# Altium PCB PCB1.PcbDoc (part 1 of 2)
Units mil, origin at the board's own origin, x right, y up, seen from the top; angles counter-clockwise.
Board outline 2755.91 x 2362.2 mil, 4 copper layers (Top Layer, GND, POWER, Bottom Layer), stack 23.756 mil thick; 125 components, 157 nets, 714 pads, 307 vias.
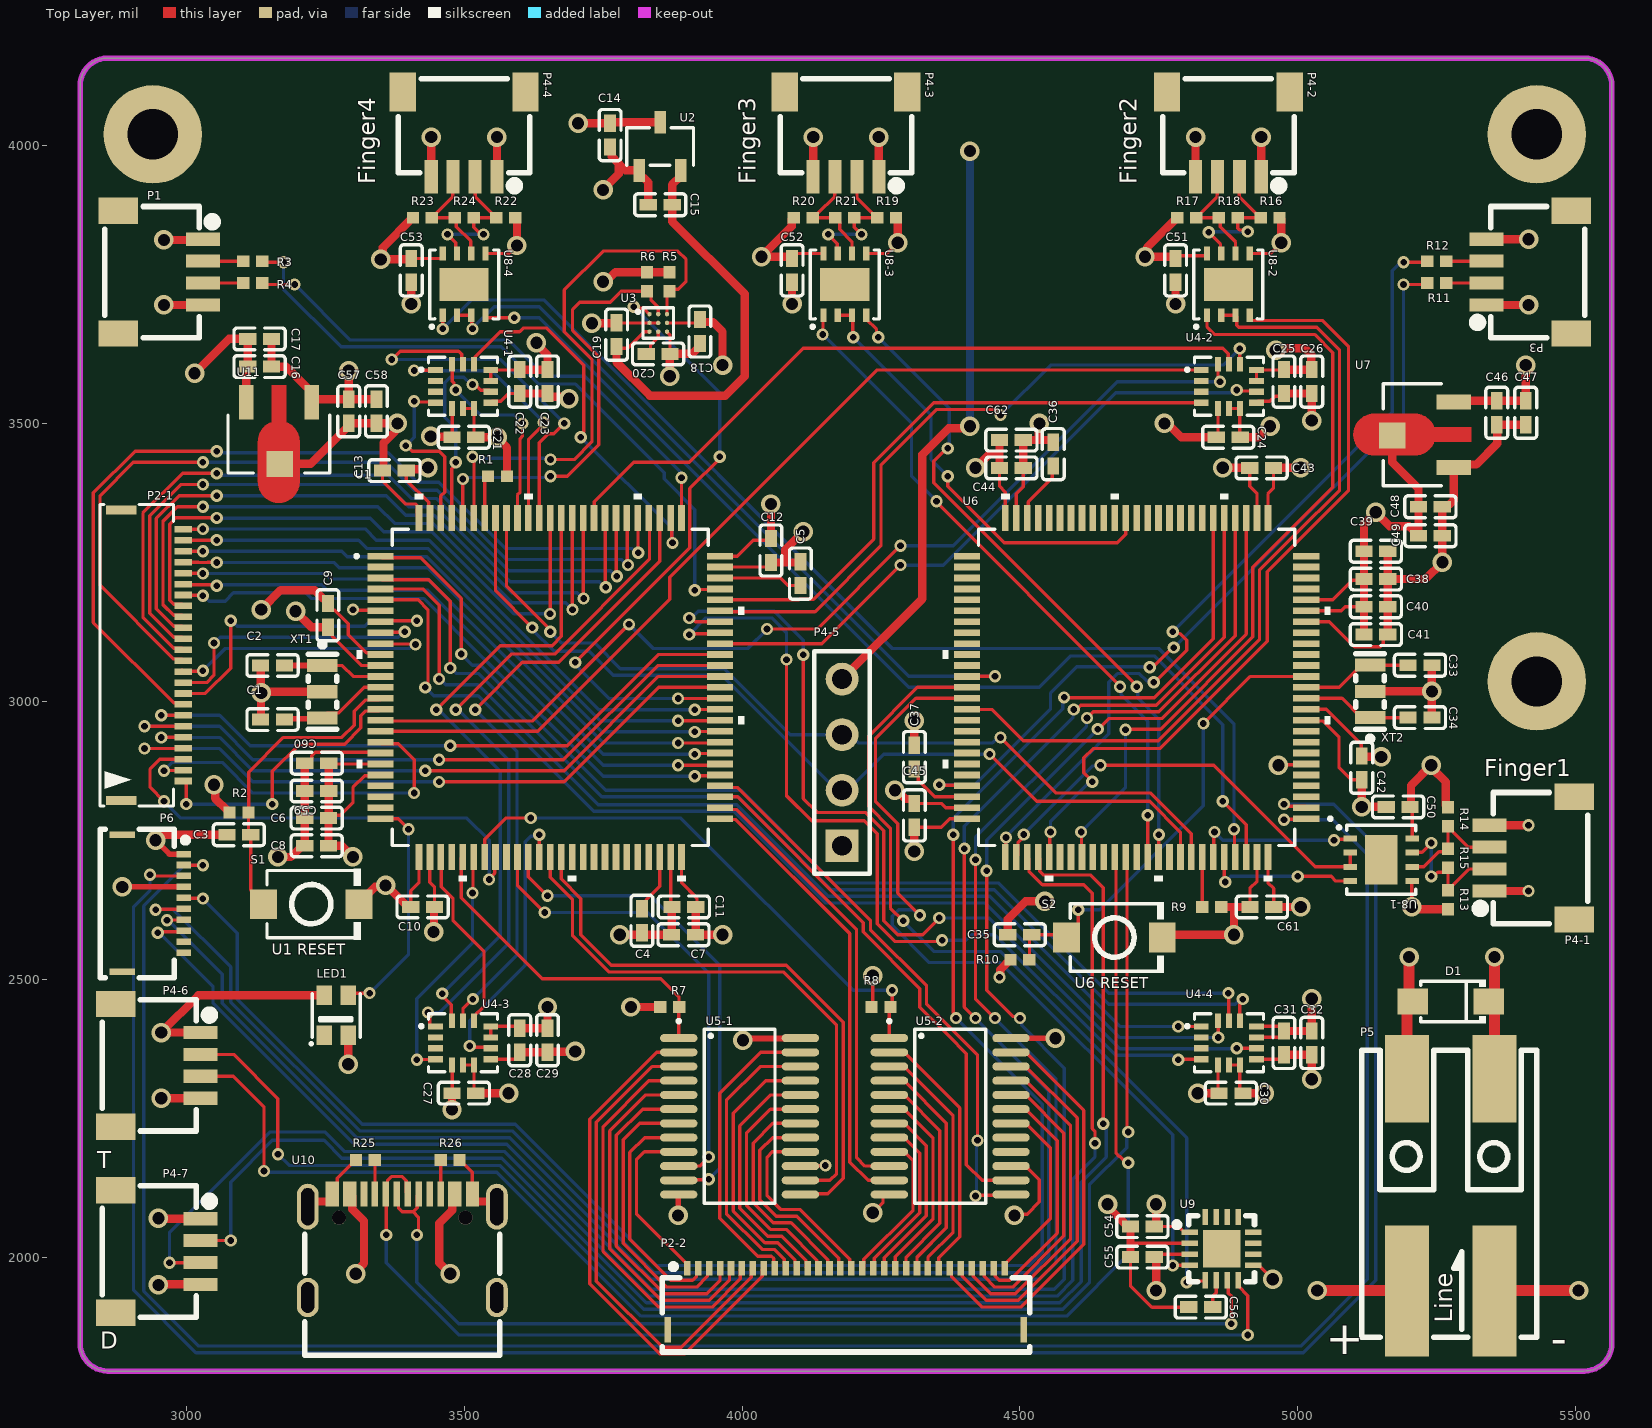
[diagram p0: Top Layer view]
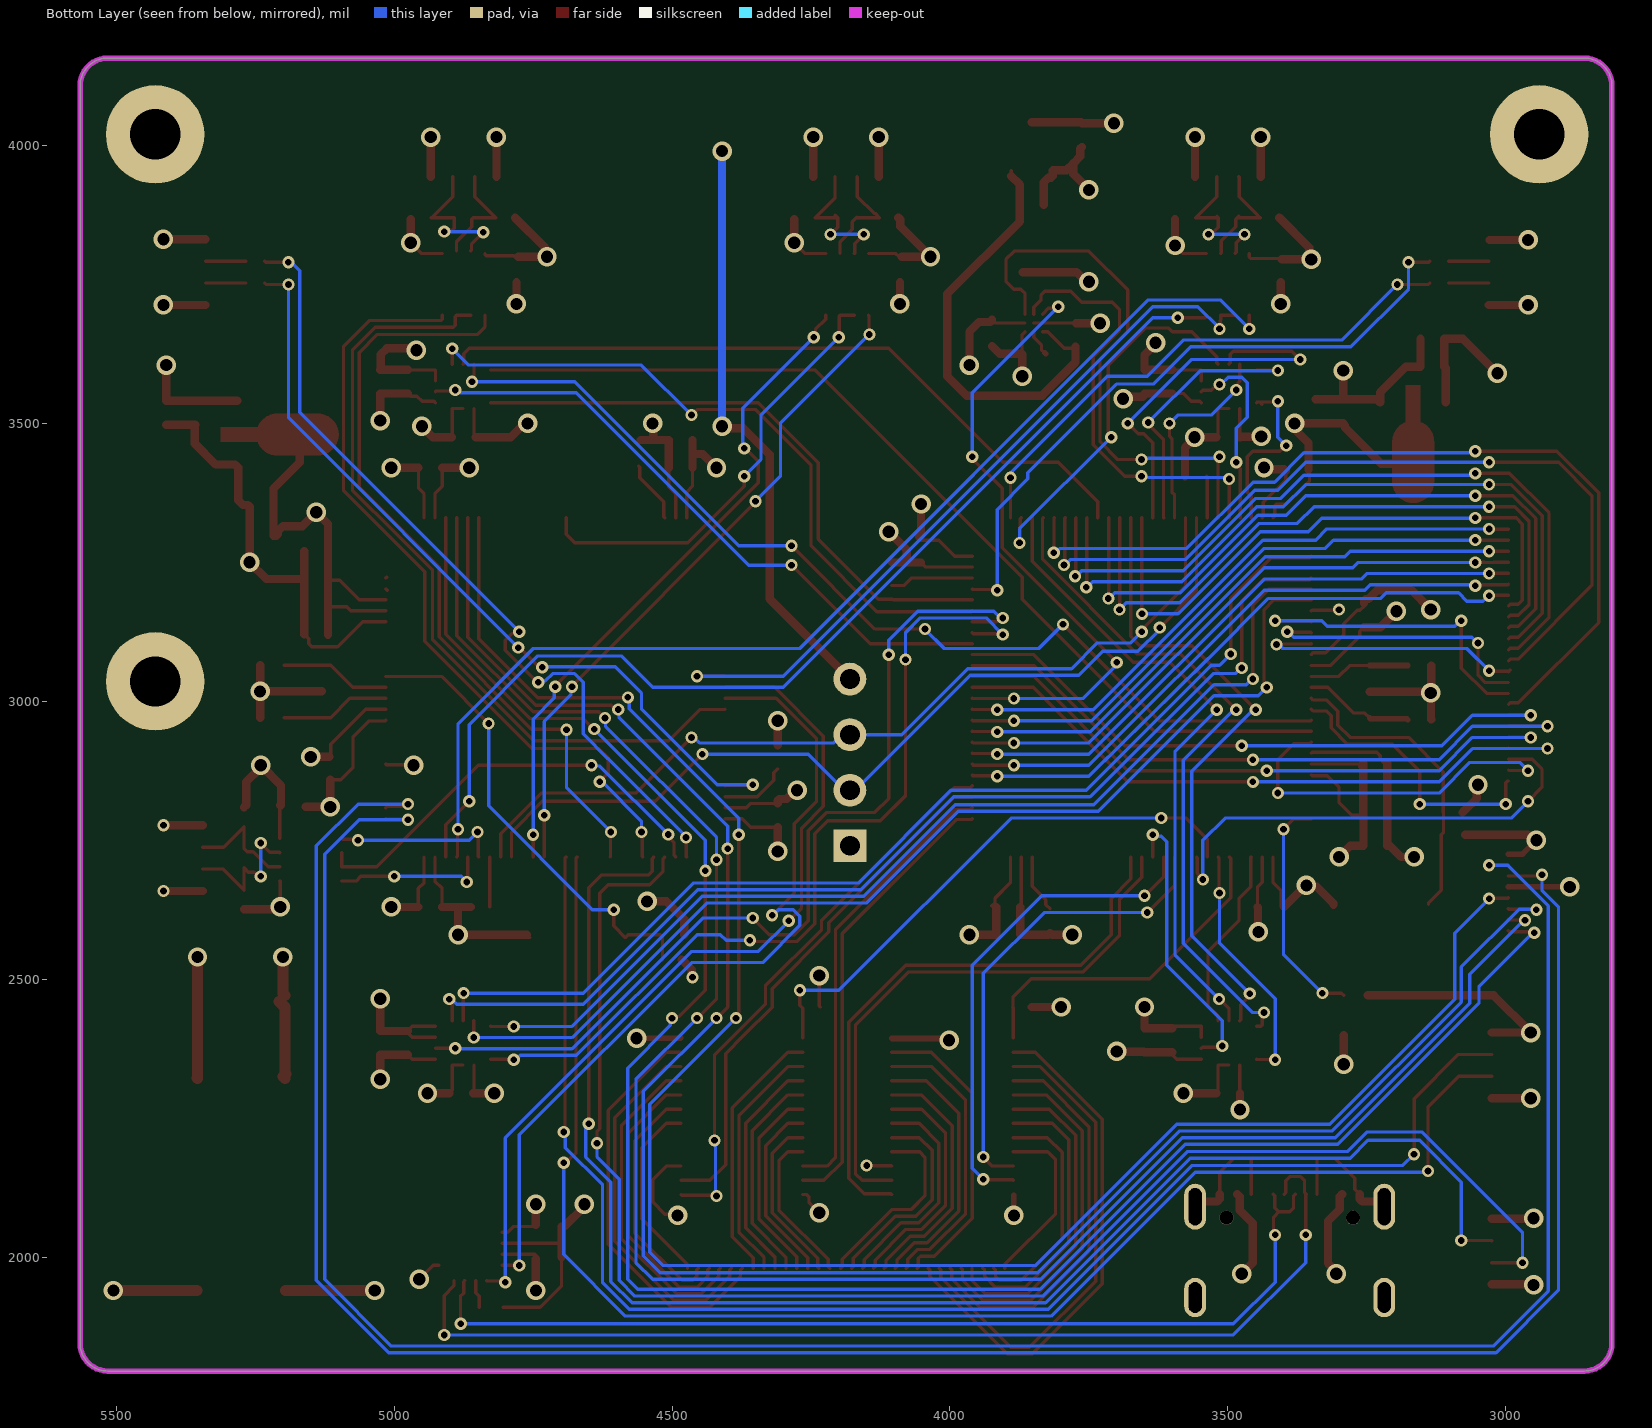
[diagram p1: Bottom Layer view, seen from below]
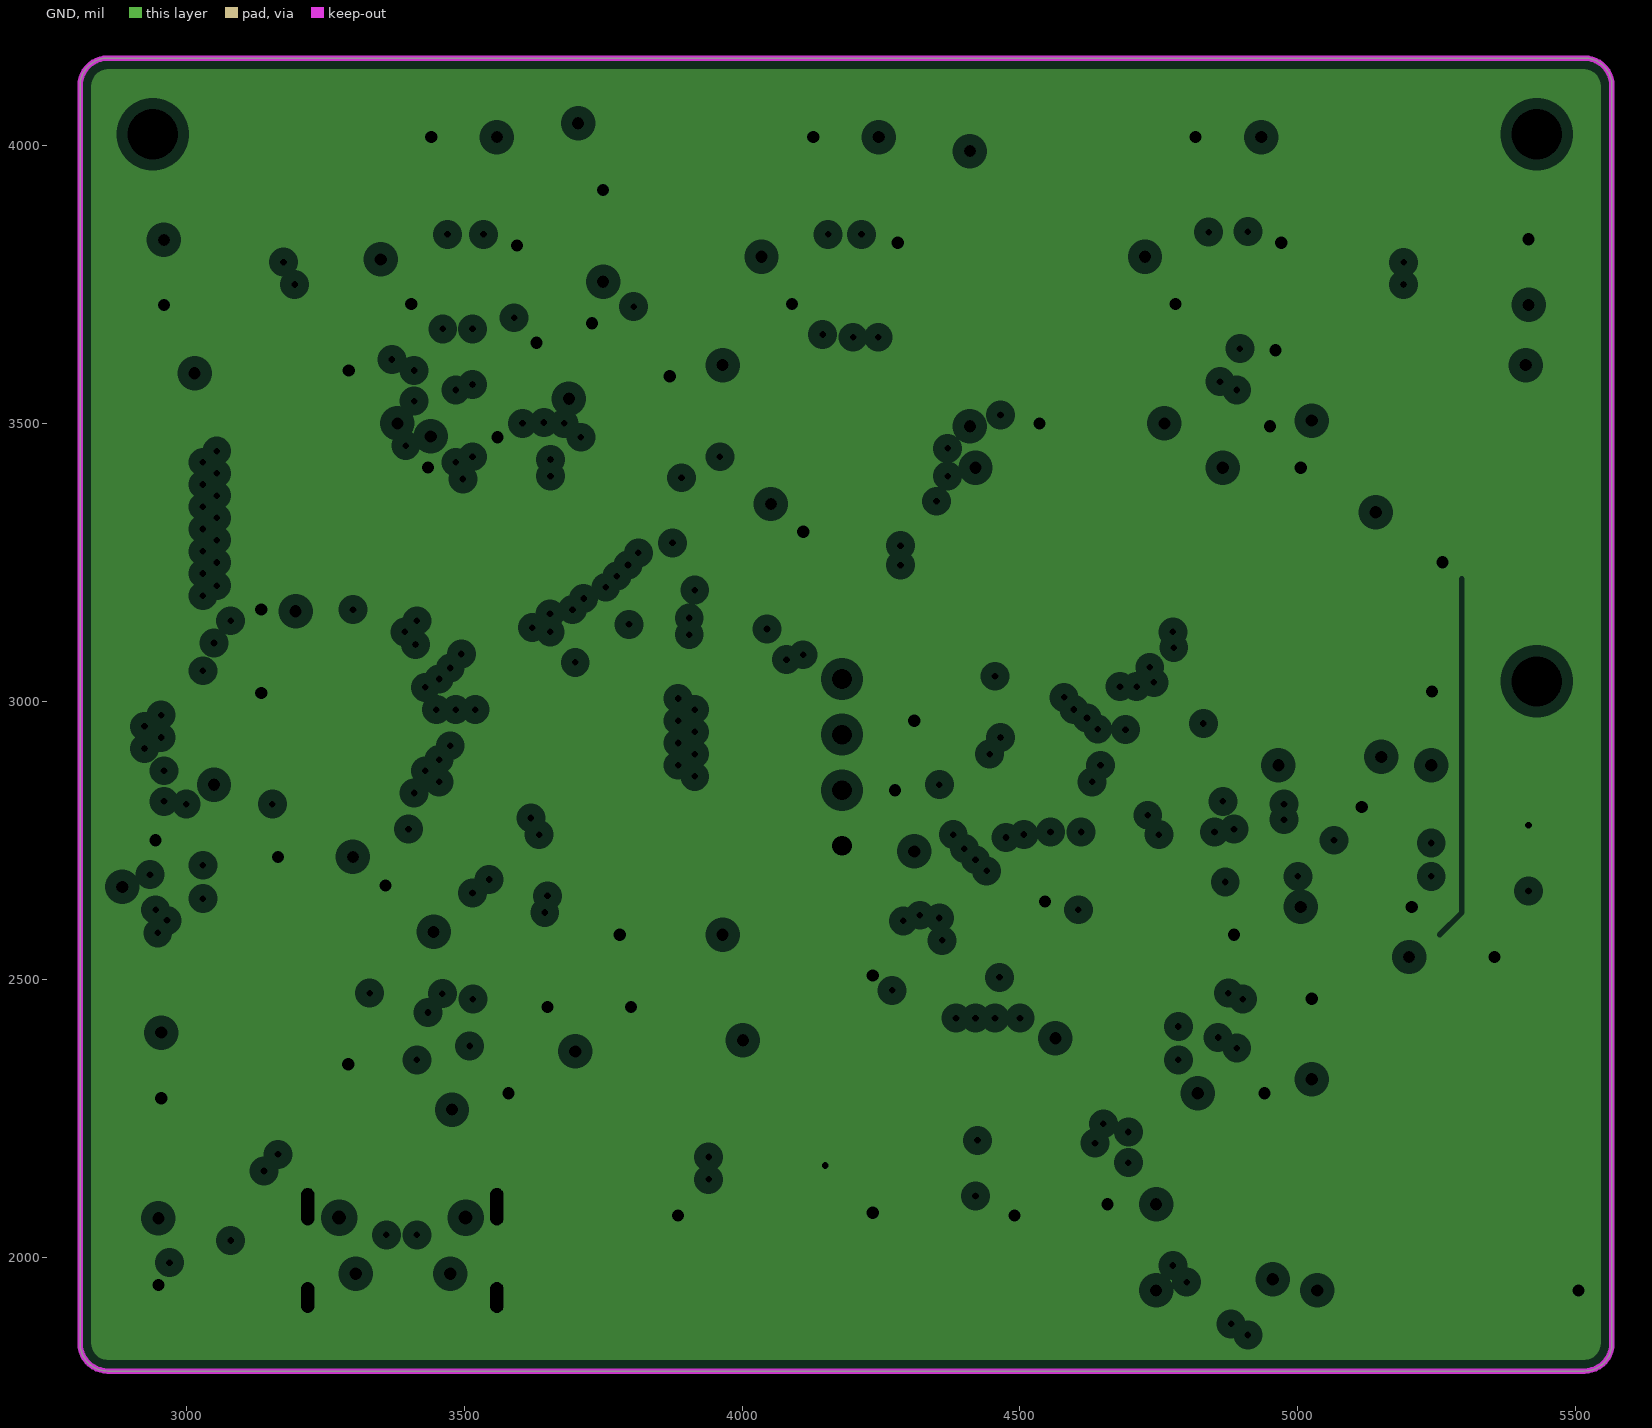
[diagram p2: GND, clearances drawn from the general rule]
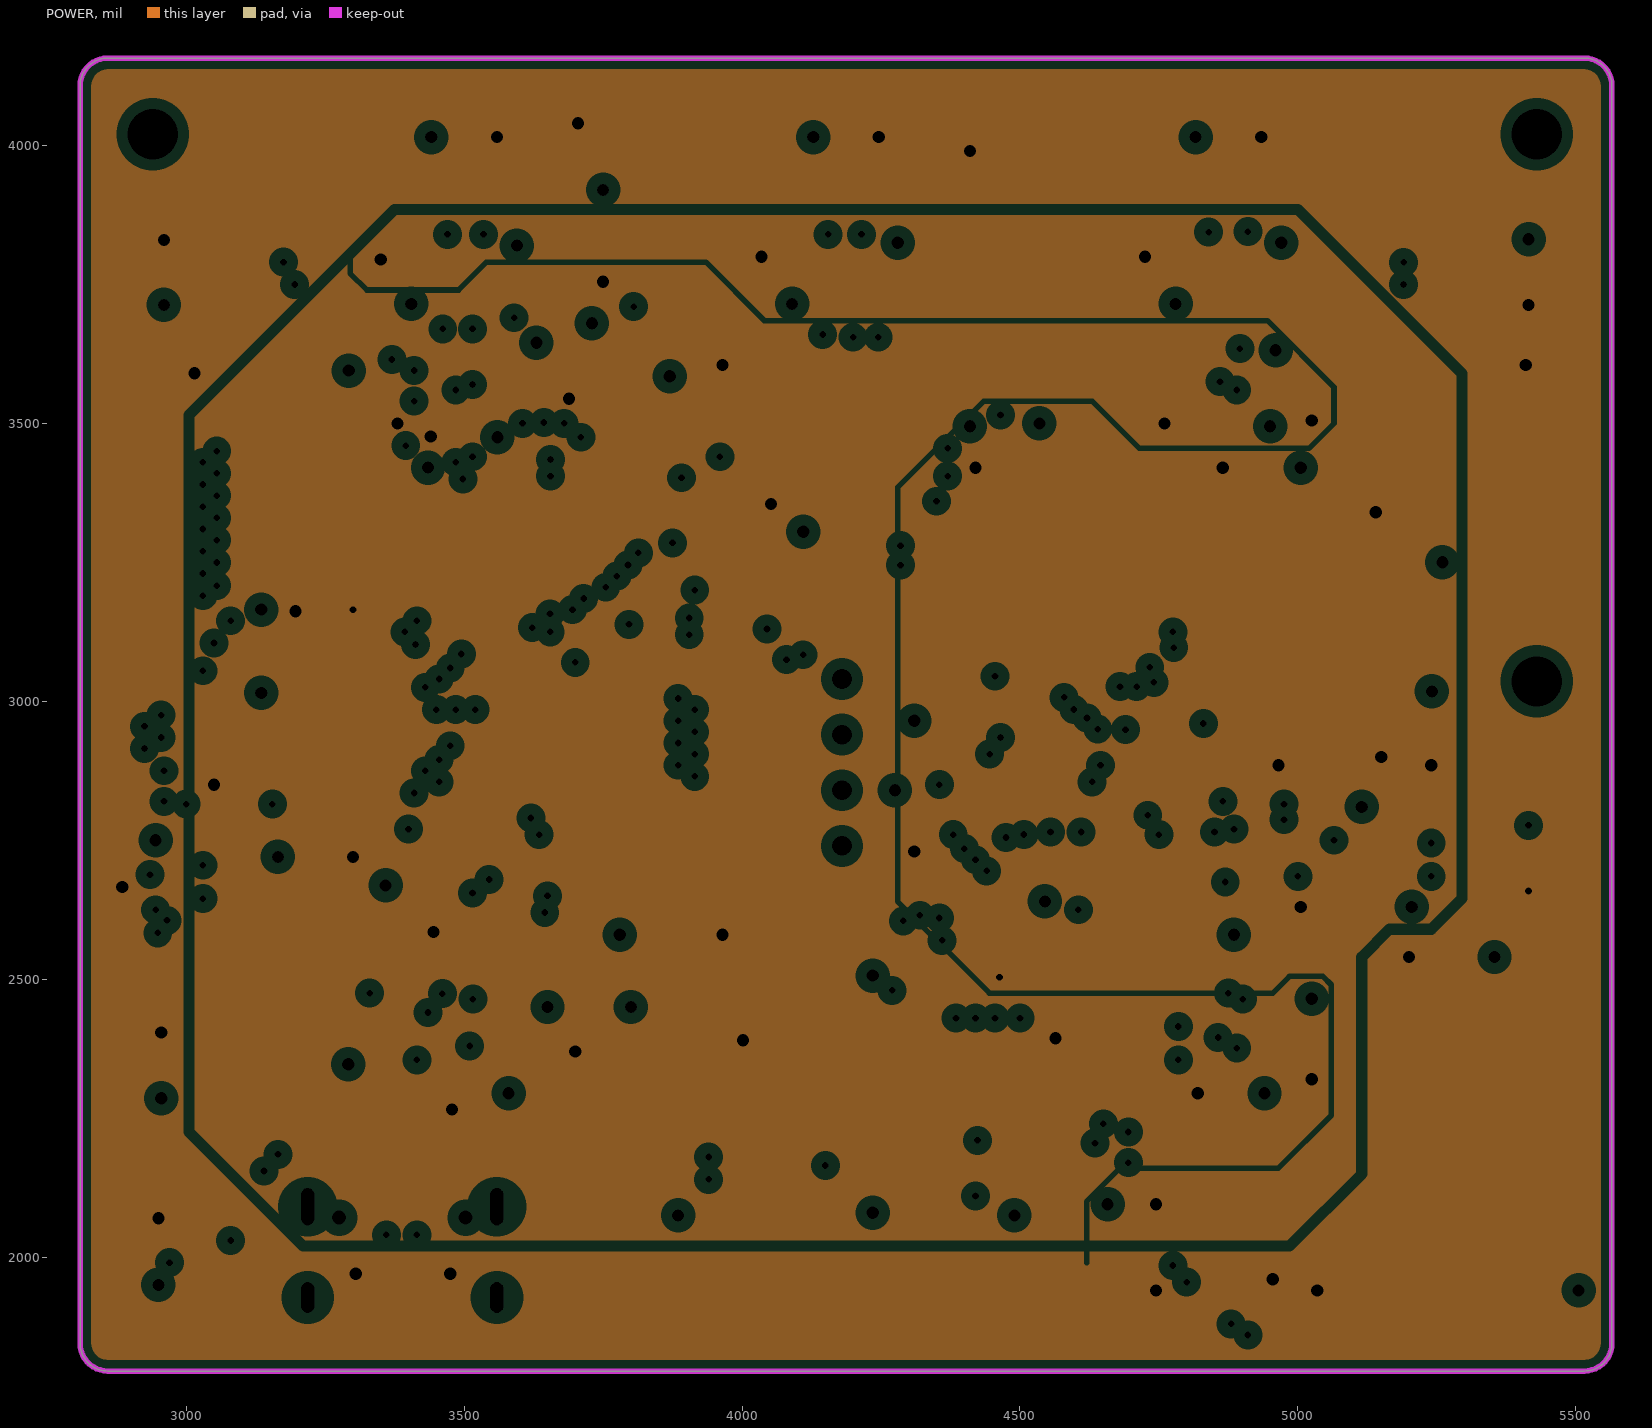
[diagram p3: POWER, clearances drawn from the general rule]
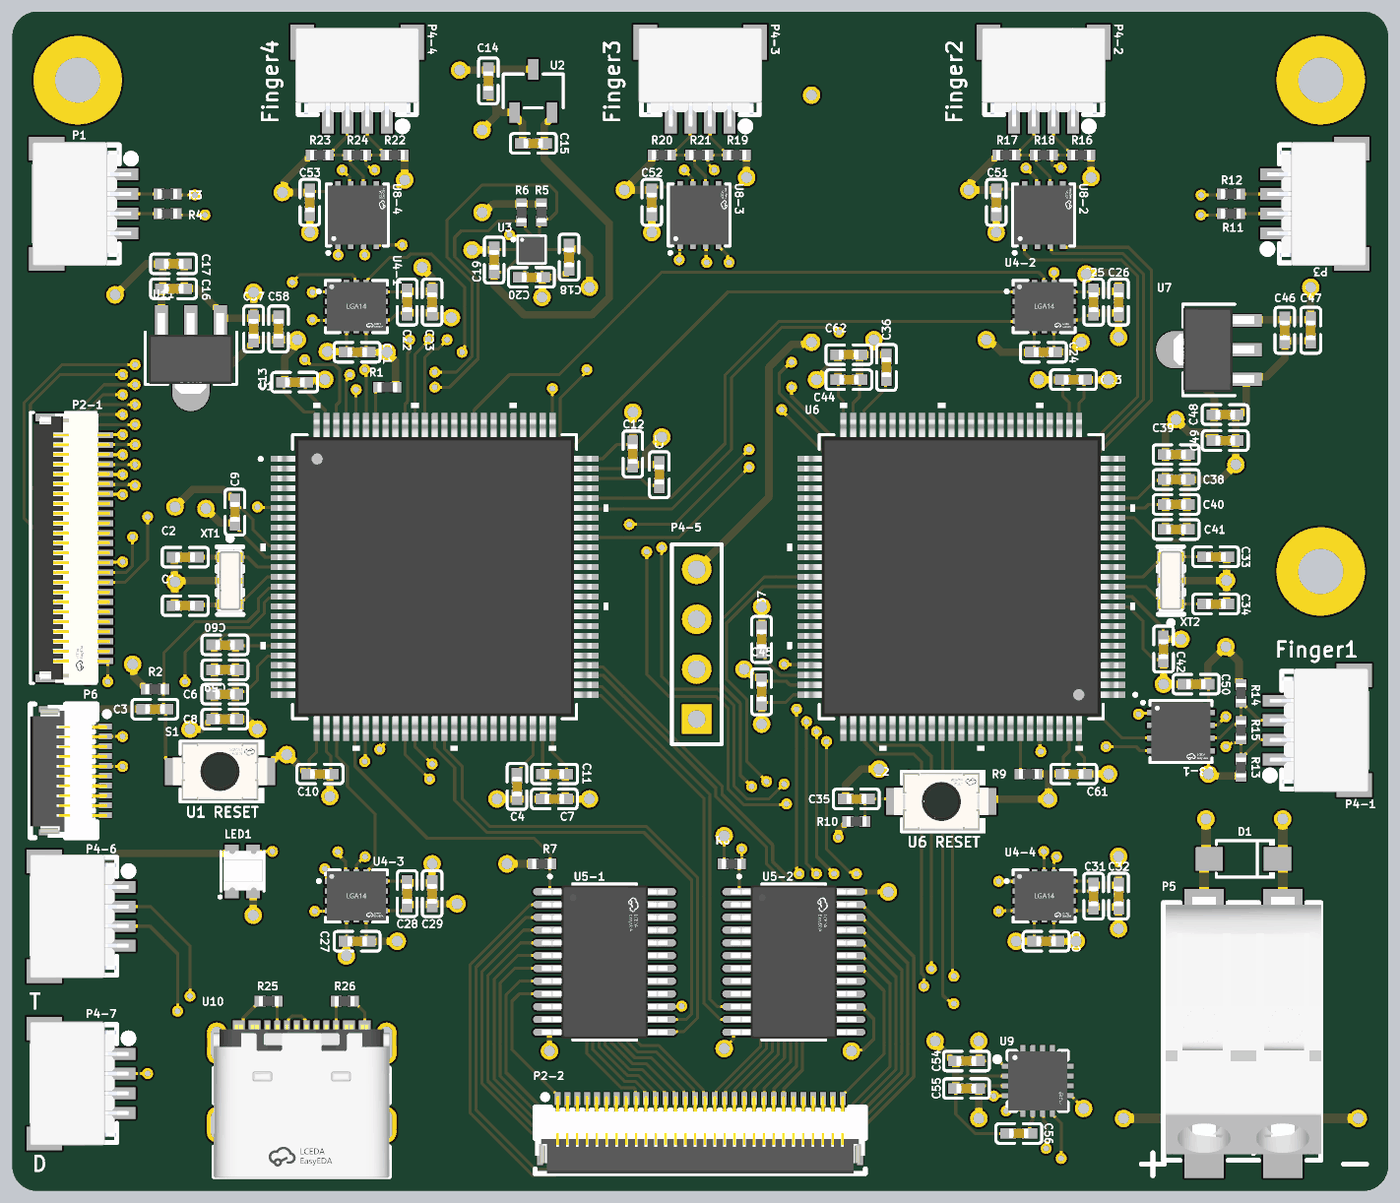
[diagram p5: 3D render of the assembled board from above, using the file's embedded part models]

## Layer stack, top to bottom
Top Solder: solder mask 0.4, Solder Resist, Dk 3.5
Top Layer: signal copper 1.4
Dielectric 2: prepreg 2.8, PP-006, Dk 4.1
GND: plane copper 1.378, net GND
Dielectric 1: dielectric 12.6, FR-4, Dk 4.8
POWER: plane copper 1.378, net (Multiple Nets)
Dielectric 3: prepreg 2.8, PP-006, Dk 4.1
Bottom Layer: signal copper 1.4
Bottom Solder: solder mask 0.4, Solder Resist, Dk 3.5

## Board outline
2809.09,1845 ccw(c2859.09,1845) 2859.09,1795 5515,1795 ccw(c5515,1845) 5565,1845 5565,4107.2 ccw(c5515,4107.2) 5515,4157.2 2859.09,4157.2 ccw(c2859.09,4107.2) 2809.09,4107.2

## Design rules (kind name [scope] priority, off if disabled: settings)
Clearance Clearance_BGA [WithinRoom('BGA','BGA_1')] p1: gap=3 ignorepadtopadclearanceinfootprint=FALSE
Clearance [All] p2: gap=10 ignorepadtopadclearanceinfootprint=FALSE
FanoutControl Fanout_BGA [IsBGA] p1: bgadir=Out bgaviamode=Centered fanoutstyle=BGA fanoutdirection=Alternating viagrid=1 // Fanout_BGA (Default Rule)
FanoutControl Fanout_Default [All] p5: bgadir=Out bgaviamode=Centered fanoutstyle=BGA fanoutdirection=Alternating viagrid=1 // Fanout_Default (Default Rule)
PlaneClearance [All] p1: clearance=20
PlaneConnect [All] p1: planeconnectstyle=Relief reliefexpansion=20 reliefentries=4 reliefconductorwidth=10 reliefairgap=10
PolygonConnect [All] p1: connectstyle=Relief reliefconductorwidth=10 reliefentries=4 polygonreliefangle="90 Angle" airgapwidth=10
RoutingVias RoutingVias_BGA [WithinRoom('BGA','BGA_1')] p1: holewidth=8 width=16 viastyle="Through Hole" minholewidth=8 minwidth=16 maxholewidth=8 maxwidth=18
RoutingVias [All] p2: holewidth=10 width=22 viastyle="Through Hole" minholewidth=10 minwidth=22 maxholewidth=28 maxwidth=35
ShortCircuit [All] p1: allowed=TRUE
SolderMaskExpansion [All] p1: expansion=4 istentingtop=FALSE
SupplyNets "Schematic Supply Nets_6" [InNet('VDD2')] p1: voltage=0.000
SupplyNets "Schematic Supply Nets_4" [InNet('VDD1')] p2: voltage=0.000
SupplyNets "Schematic Supply Nets_5" [InNet('1.8V')] p3: voltage=0.000
SupplyNets "Schematic Supply Nets_2" [InNet('GND')] p4: voltage=0.000
SupplyNets "Schematic Supply Nets" [InNet('+5V')] p5: voltage=0.000
Width Width_BGA [WithinRoom('BGA','BGA_1')] p1: maxlimit=5 minlimit=3 preferedwidth=4 minimp=50.000000 maximp=50.000000 favimp=50.000000
Width [All] p2: maxlimit=20 minlimit=6 preferedwidth=6 minimp=50.000000 maximp=50.000000 favimp=50.000000
25 further rules are at their usual default settings.

## Classes and differential pairs
component class Sheet2_COM: C33 C34 C35 C36 C37 C38 C39 C40 C41 C42 C43 C44 C45 C46 C47 C48 C49 C50 C51 C52 C53 C54 C55 C56 C61 C62 D1 P3 P4-1 P4-2 P4-3 P4-4 P4-5 P4-6 P4-7 P5 P6 R9 R10 R11 R12 R13 R14 R15 R16 R17 R18 R19 R20 R21 R22 R23 R24 R25 R26 S2 U6 U7 U8-1 U8-2 U8-3 U8-4 U9 U10 XT2
component class Sheet1_Palm: C1 C2 C3 C4 C5 C6 C7 C8 C9 C10 C11 C12 C13 C14 C15 C16 C17 C18 C19 C20 C21 C22 C23 C24 C25 C26 C27 C28 C29 C30 C31 C32 C57 C58 C59 C60 LED1 P1 P2-1 P2-2 R1 R2 R3 R4 R5 R6 R7 R8 S1 U1 U2 U3 U4-1 U4-2 U4-3 U4-4 U5-1 U5-2 U11 XT1

## Components (designator, comment, footprint, x,y, rotation, side; value= is the part's Value field where it differs from the comment)
C1 "20pF" C0402 3155,2967.2 r0 top
C2 "20pF" C0402 3155,3064.4 r0 top
C3 "0.1μF" C0402 3095,2760 r180 top
C4 "2.2μF" C0402 3820,2605 r90 top
C5 "2.2μF" C0402 4105,3230 r270 top
C6 "0.1μF" C0402 3235,2790 r180 top
C7 "4.7μF" C0402 3895,2580 r180 top
C8 "1μF" C0402 3235,2740 r180 top
C9 "0.1μF" C0402 3255,3155 r270 top
C10 "0.1μF" C0402 3425,2630 r0 top
C11 "0.1μF" C0402 3895,2630 r0 top
C12 "0.1μF" C0402 4052,3271 r90 top
C13 "0.1μF" C0402 3375,3415 r180 top
C14 "1μF" C0402 3762.6,4018.36 r90 top
C15 "1μF" C0402 3852.6,3893.36 r0 top
C16 "10μF" C0402 3132.32,3602.08 r180 top
C17 "0.1μF" C0402 3132.32,3652.08 r180 top
C18 "0.1μF" C0402 3924.25,3665 r90 top
C19 "0.1μF" C0402 3774.25,3660 r270 top
C20 "2.2μF" C0402 3849.25,3625 r180 top
C21 "10nF" C0402 3500,3475 r180 top
C22 "0.1μF" C0402 3600,3575 r90 top
C23 "2.2μF" C0402 3650,3575 r90 top
C24 "10nF" C0402 4875,3475 r180 top
C25 "0.1μF" C0402 4975,3575 r90 top
C26 "2.2μF" C0402 5025,3575 r90 top
C27 "10nF" C0402 3500,2295 r180 top
C28 "0.1μF" C0402 3600,2390 r90 top
C29 "2.2μF" C0402 3650,2390 r90 top
C30 "10nF" C0402 4880,2295 r180 top
C31 "0.1μF" C0402 4975,2385 r90 top
C32 "2.2μF" C0402 5025,2385 r90 top
C33 "20pF" C0402 5220,3065 r180 top
C34 "20pF" C0402 5220,2970.6 r180 top
C35 "0.1μF" C0402 4500,2580 r180 top
C36 "2.2μF" C0402 4560,3445 r270 top
C37 "2.2μF" C0402 4310,2900 r270 top
C38 "0.1μF" C0402 5140,3220 r0 top
C39 "1μF" C0402 5140,3270 r0 top
C40 "0.1μF" C0402 5140,3170 r0 top
C41 "1μF" C0402 5140,3120 r0 top
C42 "0.1μF" C0402 5115,2880 r90 top
C43 "0.1μF" C0402 4935,3420 r180 top
C44 "0.1μF" C0402 4485,3420 r180 top
C45 "0.1μF" C0402 4310,2795 r270 top
C46 "10μF" C0402 5357.95,3518.7 r90 top
C47 "0.1μF" C0402 5410,3518.7 r90 top
C48 "10μF" C0402 5238.85,3350 r180 top
C49 "0.1μF" C0402 5238.85,3297.95 r180 top
C50 "0.1μF" C0402 5180,2810 r0 top
C51 "0.1μF" C0402 4780,3775 r90 top
C52 "0.1μF" C0402 4090,3775 r90 top
C53 "0.1μF" C0402 3405,3775 r90 top
C54 "" C0402 4720,2055 r0 top value=1μF
C55 "" C0402 4720,2000 r0 top value=1μF
C56 "" C0402 4825,1910 r0 top value=0.1μF
C57 "10μF" C0402 3292.32,3522.08 r270 top
C58 "0.1μF" C0402 3342.32,3522.08 r270 top
C59 "0.1μF" C0402 3235.3,2838.63 r180 top
C60 "1μF" C0402 3235.3,2888.63 r180 top
C61 "0.1μF" C0402 4935,2630 r0 top
C62 "4.7μF" C0402 4484.37,3470 r0 top
D1 "SMF5.0A" SOD-123FL_L2.7-W1.8-LS3.8-RD 5275,2460 r180 top
LED1 "WS2812B-2020" LED-SMD_4P-L2.0-W2.0-TL_WS2812B-2020 3270,2435 r90 top
P1 "Header 4" CONN-SMD_XDWF-0910-04P 2954.21,3772.14 r270 top
P2-1 "Header 24" FPC-SMD_F0502-B-24-10G-R 2939.2,3082.96 r270 top
P2-2 "Header 30" FPC-SMD_30P-P0.50_HCTL_HC-FPC-05-10-30RLTAG 4186.83,1924.68 r180 top
P3 "Header 4" CONN-SMD_XDWF-0910-04P 5415.79,3772.14 r90 top
P4-1 "Header 4" CONN-SMD_XDWF-0910-04P 5420.79,2717.86 r90 top
P4-2 "Header 4" CONN-SMD_XDWF-0910-04P 4875,4020 r180 top
P4-3 "Header 4" CONN-SMD_XDWF-0910-04P 4187.05,4020 r180 top
P4-4 "Header 4" CONN-SMD_XDWF-0910-04P 3500,4020 r180 top
P4-5 "Header 4" HDR1X4 4180,2740 r90 top
P4-6 "Header 4" CONN-SMD_XDWF-0910-04P 2949.21,2345 r270 top
P4-7 "Header 4" CONN-SMD_XDWF-0910-04P 2949.21,2010 r270 top
P5 "Header 2" CONN-SMD_2060-452 5275,2130 r90 top
P6 "Header 10" FPC-SMD_10P-P0.50_HCTL_HC-FPC-05-10-10RLTAG 2940.32,2636.57 r90 top
R1 "10K" R0402 3560,3405 r180 top
R2 "10K" R0402 3095,2800 r180 top
R3 "22R" R0402 3120,3791.83 r180 top
R4 "22R" R0402 3120,3752.46 r180 top
R5 "10K" R0402 3869.25,3755 r270 top
R6 "10K" R0402 3829.25,3755 r270 top
R7 "20K" R0402 3870,2450 r0 top
R8 "20K" R0402 4250,2450 r0 top
R9 "10K" R0402 4845,2630 r180 top
R10 "10K" R0402 4500,2535 r180 top
R11 "22R" R0402 5250,3752.46 r0 top
R12 "22R" R0402 5250,3791.83 r0 top
R13 "10K" R0402 5270,2642.96 r90 top
R14 "10K" R0402 5270,2792.04 r90 top
R15 "120R" R0402 5270,2717.86 r270 top
R16 "10K" R0402 4950,3870 r180 top
R17 "10K" R0402 4800,3870 r180 top
R18 "120R" R0402 4875,3870 r0 top
R19 "10K" R0402 4260,3870 r180 top
R20 "10K" R0402 4110,3870 r180 top
R21 "120R" R0402 4185,3870 r0 top
R22 "10K" R0402 3575,3870 r180 top
R23 "10K" R0402 3425,3870 r180 top
R24 "120R" R0402 3500,3870 r0 top
R25 "5.1K" R0402 3322.51,2175 r0 top
R26 "5.1K" R0402 3474.7,2175 r180 top
S1 "Reset" SW-SMD_L3.9-W3.0-P4.45 3225,2635 r0 top
S2 "Reset" SW-SMD_L3.9-W3.0-P4.45 4670,2575 r0 top
U1 "STM32H743VGT6" LQFP100-14x14mm 3655,3025 r0 top
U2 "XC6206P182MR" SOT-23-3_L3.0-W1.7-P0.95-LS2.9-BR 3852.6,3998.36 r270 top
U3 "BMM350" WLCSP-9_L1.3-W1.3-R3-C3-P0.40-TL 3849.25,3680.75 r0 top
U4-1 "ICM-42688-P" LGA-14_L3.0-W2.5-P0.50-TL 3498.07,3566.65 r0 top
U4-2 "ICM-42688-P" LGA-14_L3.0-W2.5-P0.50-TL 4876.02,3566.65 r0 top
U4-3 "ICM-42688-P" LGA-14_L3.0-W2.5-P0.50-TL 3498.07,2385.55 r0 top
U4-4 "ICM-42688-P" LGA-14_L3.0-W2.5-P0.50-TL 4876.02,2385.55 r0 top
U5-1 "CD4067BMT/TR" TSSOP-24_L7.8-W4.4-P0.65-LS6.4-BL_1 3995.55,2253.39 r270 top
U5-2 "CD4067BMT/TR" TSSOP-24_L7.8-W4.4-P0.65-LS6.4-BL_1 4374.45,2253.39 r270 top
U6 "STM32H743VGT6" LQFP100-14x14mm 4710,3025 r180 top
U7 "AMS1117_3.3" AMS1117-3.3 5200,3508 r0 top
U8-1 "SIT3088ETK" DFN-8_L3.0-W3.0-P0.65-BL-EP 5150,2715 r270 top
U8-2 "SIT3088ETK" DFN-8_L3.0-W3.0-P0.65-BL-EP 4875,3750 r0 top
U8-3 "SIT3088ETK" DFN-8_L3.0-W3.0-P0.65-BL-EP 4185,3750 r0 top
U8-4 "SIT3088ETK" DFN-8_L3.0-W3.0-P0.65-BL-EP 3500,3750 r0 top
U9 "CH343P" CH343P 4862.91,2015.15 r270 top
U10 "Type-C 16Pin" USB-C-SMD_TYPE-C16PIN 3388.77,2020.35 r0 top
U11 "AMS1117_3.3" AMS1117-3.3 3138.48,3457.08 r90 top
XT1 "8MHz 3PIN" "8MHz 0.07% OSC-SMD_3P-L3.2-W1.3-P1.20-L" 3245,3017.2 r270 top
XT2 "8MHz 3PIN" "8MHz 0.07% OSC-SMD_3P-L3.2-W1.3-P1.20-L" 5130,3017.8 r90 top

## Footprints (in the part's own frame and the unit in brackets; to place one, negate y for a bottom-side part, rotate by r counter-clockwise, add the part's x,y. Pads: shape width x height; smd on the part's side, far side on the other; paste and mask are expansions set on the pad)
"8MHz 0.07% OSC-SMD_3P-L3.2-W1.3-P1.20-L" [mm]
  rect 0.6x1.4 smd paste+0 mask+0.051: 1(-1.199,0) 2(0,0) 3(1.199,0)
  silkscreen extent -2.28,-0.65 1.72,0.66, body extent -1.6,-0.66 1.6,0.66, height 0.81
AMS1117-3.3 [mm] "SOT-89_L4.5-W2.5-P1.50-LS4.2-BR"
  rect 1.575x0.672 smd paste+0 mask+0.051: 1(2.049,-2.222) 3(2.049,0.778)
  rect 1.2x1.2 smd: 2(-0.762,-0.762)
  Top Layer region: -1.59,0.237 0.264,0.237 0.308,0.236 0.353,0.233 0.397,0.227 0.441,0.22 0.485,0.211 0.528,0.2 0.57,0.186 0.612,0.171 0.653,0.154 0.693,0.134 0.732,0.113 0.771,0.09 0.808,0.066 0.844,0.039 0.878,0.011 0.912,-0.018 0.944,-0.049 0.974,-0.082 1.003,-0.116 1.03,-0.151 1.055,-0.188 1.079,-0.225 1.101,-0.264 1.121,-0.304 1.139,-0.383 2.837,-0.383 2.837,-1.043 1.139,-1.043 1.121,-1.122 1.101,-1.162 1.079,-1.201 1.055,-1.239 1.03,-1.275 1.003,-1.31 0.974,-1.344 0.944,-1.377 0.912,-1.408 0.878,-1.438 0.844,-1.466 0.808,-1.492 0.771,-1.517 0.732,-1.54 0.693,-1.561 0.653,-1.58 0.612,-1.597 0.57,-1.612 0.528,-1.626 0.485,-1.637 0.441,-1.646 0.397,-1.654 0.353,-1.659 0.308,-1.662 0.264,-1.663 -1.59,-1.663 -1.635,-1.662 -1.679,-1.659 -1.723,-1.654 -1.767,-1.646 -1.811,-1.637 -1.854,-1.626 -1.897,-1.612 -1.938,-1.597 -1.979,-1.58 -2.02,-1.561 -2.059,-1.54 -2.097,-1.517 -2.134,-1.492 -2.17,-1.466 -2.205,-1.438 -2.238,-1.408 -2.27,-1.377 -2.3,-1.344 -2.329,-1.31 -2.356,-1.275 -2.382,-1.239 -2.405,-1.201 -2.427,-1.162 -2.448,-1.122 -2.466,-1.082 -2.482,-1.04 -2.496,-0.998 -2.509,-0.955 -2.519,-0.912 -2.528,-0.868 -2.534,-0.824 -2.538,-0.78 -2.54,-0.735 -2.54,-0.691 -2.538,-0.646 -2.534,-0.602 -2.528,-0.558 -2.519,-0.514 -2.509,-0.471 -2.496,-0.428 -2.482,-0.386 -2.466,-0.344 -2.448,-0.304 -2.427,-0.264 -2.405,-0.225 -2.382,-0.188 -2.356,-0.151 -2.329,-0.116 -2.3,-0.082 -2.27,-0.049 -2.238,-0.018 -2.205,0.011 -2.17,0.039 -2.134,0.066 -2.097,0.09 -2.059,0.113 -2.02,0.134 -1.979,0.154 -1.938,0.171 -1.897,0.186 -1.854,0.2 -1.811,0.211 -1.767,0.22 -1.723,0.227 -1.679,0.233 -1.635,0.236 -1.59,0.237
  silkscreen extent -1.18,-3.05 1.47,1.6, body extent -1.65,-2.86 2.45,1.44, height 1.61
C0402 [mm]
  rect 0.79x0.54 smd mask+0.051: 1(-0.537,0) 2(0.553,0)
  silkscreen extent -1.16,-0.5 1.18,0.5, body extent -0.5,-0.25 0.5,0.25, height 0.5
CH343P [mm] "TQFN-16_L3.0-W3.0-P0.50-BL-EP1.7"
  rect 0.25x0.75 smd mask+0.051: 1(-0.748,-1.45) 2(-0.249,-1.45) 3(0.252,-1.45) 4(0.751,-1.45) 9(0.75,1.45) 10(0.25,1.45) 11(-0.25,1.45) 12(-0.749,1.45)
  rect 0.75x0.25 smd mask+0.051: 5(1.45,-0.75) 6(1.45,-0.25) 7(1.45,0.25) 8(1.45,0.75) 13(-1.45,0.75) 14(-1.45,0.25) 15(-1.45,-0.25) 16(-1.45,-0.75)
  rect 1.7x1.7 smd mask+0.051: 17(0,0)
  silkscreen extent -1.5,-2.17 1.5,1.5, body extent -1.51,-1.51 1.51,1.51, height 0.81
CONN-SMD_2060-452 [mm] "2060-452/998-404"
  rect 6x2 smd: 1(-4.853,2) 2(-4.853,-2)
  rect 4x2 smd: 1(4.853,2) 2(4.853,-2)
  silkscreen extent -6.96,-3.94 6.16,4.06, body extent -6.65,-3.95 6.45,3.95, height 4.5
CONN-SMD_XDWF-0910-04P [mm]
  rect 0.6x1.55 smd: 1(-1.5,1.938) 2(-0.5,1.938) 3(0.5,1.938) 4(1.5,1.938)
  rect 1.2x1.8 smd: 5(-2.8,-1.937) 6(2.8,-1.937)
  silkscreen extent -3,-2.55 3,2.55, body extent -3.15,-2.67 3.15,2.38, height 3.14
DFN-8_L3.0-W3.0-P0.65-BL-EP [mm] "SIT3088ETK"
  rect 0.28x0.625 smd: 1(-0.975,-1.412) 2(-0.325,-1.412) 3(0.325,-1.412) 4(0.975,-1.412) 5(0.975,1.412) 6(0.325,1.412) 7(-0.325,1.412) 8(-0.975,1.412)
  rect 2.25x1.5 smd: 9(0,0)
  silkscreen extent -1.58,-2.01 1.58,1.58, body extent -1.5,-1.51 1.5,1.51, height 0.92
FPC-SMD_10P-P0.50_HCTL_HC-FPC-05-10-10RLTAG [mm] "HC-FPC-05-10-10RLTAG / C5213731"
  rect 0.3x0.65 smd paste+0 mask+0.05: 1(2.25,-1.405) 2(1.75,-1.405) 3(1.25,-1.405) 4(0.75,-1.405) 5(0.25,-1.405) 6(-0.25,-1.405) 7(-0.75,-1.405) 8(-1.25,-1.405) 9(-1.75,-1.405) 10(-2.25,-1.405)
  rect 0.3x1.15 smd paste+0 mask+0.05: 11(-3.135,1.405) 12(3.135,1.405)
  silkscreen extent -3.4,-1.6 3.39,2.42, body extent -3.42,-1.49 3.36,2.43, height 1.01
FPC-SMD_30P-P0.50_HCTL_HC-FPC-05-10-30RLTAG [mm] "HC-FPC-05-10-30RLTAG / C5213742"
  rect 0.3x0.65 smd paste+0 mask+0.05: 1(7.25,-1.405) 2(6.75,-1.405) 3(6.25,-1.405) 4(5.75,-1.405) 5(5.25,-1.405) 6(4.75,-1.405) 7(4.25,-1.405) 8(3.75,-1.405) 9(3.25,-1.405) 10(2.75,-1.405) 11(2.25,-1.405) 12(1.75,-1.405) 13(1.25,-1.405) 14(0.75,-1.405) 15(0.25,-1.405) 16(-0.25,-1.405) 17(-0.75,-1.405) 18(-1.25,-1.405) 19(-1.75,-1.405) 20(-2.25,-1.405) 21(-2.75,-1.405) 22(-3.25,-1.405) 23(-3.75,-1.405) 24(-4.25,-1.405) 25(-4.75,-1.405) 26(-5.25,-1.405) 27(-5.75,-1.405) 28(-6.25,-1.405) 29(-6.75,-1.405) 30(-7.25,-1.405)
  rect 0.3x1.15 smd paste+0 mask+0.05: 31(-8.135,1.405) 32(8.135,1.405)
  silkscreen extent -8.4,-1.6 8.39,2.42, body extent -8.39,-1.51 8.39,2.41, height 1.01
FPC-SMD_F0502-B-24-10G-R [mm] "F0502-B-24-10G-R / C512913"
  rect 0.3x0.8 smd: 1(5.75,1.417) 2(5.25,1.417) 3(4.75,1.417) 4(4.25,1.417) 5(3.75,1.417) 6(3.25,1.417) 7(2.75,1.417) 8(2.25,1.417) 9(1.75,1.417) 10(1.25,1.417) 11(0.75,1.417) 12(0.25,1.417) 13(-0.25,1.417) 14(-0.75,1.417) 15(-1.25,1.417) 16(-1.75,1.417) 17(-2.25,1.417) 18(-2.75,1.417) 19(-3.25,1.417) 20(-3.75,1.417) 21(-4.25,1.417) 22(-4.75,1.417) 23(-5.25,1.417) 24(-5.75,1.417)
  rect 0.4x1.4 smd: 25(-6.635,-1.417) 26(6.635,-1.417)
  silkscreen extent -6.89,-2.39 6.89,0.96, body extent -6.85,-2.22 6.85,1.65, height 1.01
HDR1X4 [mm] "Connector; Header; 4 Position"
  rect 1.5x1.5 hole 0.9: 1(0,0)
  round 1.5 hole 0.9: 2(2.54,0) 3(5.08,0) 4(7.62,0)
  silkscreen extent -1.27,-1.27 8.89,1.27
LED-SMD_4P-L2.0-W2.0-TL_WS2812B-2020 [mm] "WS2812B-2020"
  rect 0.9x0.7 smd: 1(-0.915,0.55) 2(-0.915,-0.55) 3(0.915,-0.55) 4(0.915,0.55)
  silkscreen extent -1.3,-1.1 1,1.15, body extent -0.97,-1.04 1.03,0.97, height 0.84
LGA-14_L3.0-W2.5-P0.50-TL [mm] "ICM-42688-P"
  rect 0.675x0.28 smd: 1(-1.262,0.75) 2(-1.262,0.25) 3(-1.262,-0.25) 4(-1.262,-0.75) 8(1.262,-0.75) 9(1.262,-0.25) 10(1.262,0.25) 11(1.262,0.75)
  rect 0.28x0.675 smd: 5(-0.5,-1.012) 6(0,-1.012) 7(0.5,-1.012) 12(0.5,1.012) 13(0,1.012) 14(-0.5,1.012)
  silkscreen extent -1.98,-1.33 1.58,1.33, body extent -1.5,-1.25 1.5,1.25, height 0.92
LQFP100-14x14mm [mil]
  rect 47x12 smd paste+0 mask+0: 1(-305.12,236.22) 2(-305.12,216.54) 3(-305.12,196.85) 4(-305.12,177.17) 5(-305.12,157.48) 6(-305.12,137.8) 7(-305.12,118.11) 8(-305.12,98.43) 9(-305.12,78.74) 10(-305.12,59.06) 11(-305.12,39.37) 12(-305.12,19.69) 13(-305.12,0) 14(-305.12,-19.68) 15(-305.12,-39.37) 16(-305.12,-59.06) 17(-305.12,-78.74) 18(-305.12,-98.43) 19(-305.12,-118.11) 20(-305.12,-137.8) 21(-305.12,-157.48) 22(-305.12,-177.17) 23(-305.12,-196.85) 24(-305.12,-216.54) 25(-305.12,-236.22) 51(305.12,-236.22) 52(305.12,-216.54) 53(305.12,-196.85) 54(305.12,-177.17) 55(305.12,-157.48) 56(305.12,-137.8) 57(305.12,-118.11) 58(305.12,-98.43) 59(305.12,-78.74) 60(305.12,-59.06) 61(305.12,-39.37) 62(305.12,-19.68) 63(305.12,0) 64(305.12,19.68) 65(305.12,39.37) 66(305.12,59.06) 67(305.12,78.74) 68(305.12,98.43) 69(305.12,118.11) 70(305.12,137.8) 71(305.12,157.48) 72(305.12,177.17) 73(305.12,196.85) 74(305.12,216.54) 75(305.12,236.22)
  rect 12x47 smd paste+0 mask+0: 26(-236.22,-305.12) 27(-216.54,-305.12) 28(-196.85,-305.12) 29(-177.17,-305.12) 30(-157.48,-305.12) 31(-137.8,-305.12) 32(-118.11,-305.12) 33(-98.43,-305.12) 34(-78.74,-305.12) 35(-59.06,-305.12) 36(-39.37,-305.12) 37(-19.68,-305.12) 38(0,-305.12) 39(19.68,-305.12) 40(39.37,-305.12) 41(59.06,-305.12) 42(78.74,-305.12) 43(98.43,-305.12) 44(118.11,-305.12) 45(137.8,-305.12) 46(157.48,-305.12) 47(177.17,-305.12) 48(196.85,-305.12) 49(216.54,-305.12) 50(236.22,-305.12) 76(236.22,305.12) 77(216.54,305.12) 78(196.85,305.12) 79(177.17,305.12) 80(157.48,305.12) 81(137.8,305.12) 82(118.11,305.12) 83(98.43,305.12) 84(78.74,305.12) 85(59.06,305.12) 86(39.37,305.12) 87(19.68,305.12) 88(0,305.12) 89(-19.68,305.12) 90(-39.37,305.12) 91(-59.06,305.12) 92(-78.74,305.12) 93(-98.43,305.12) 94(-118.11,305.12) 95(-137.8,305.12) 96(-157.48,305.12) 97(-177.17,305.12) 98(-196.85,305.12) 99(-216.54,305.12) 100(-236.22,305.12)
  silkscreen extent -351,-349 349,349, body extent -315,-315 315,315, height 63
R0402 [mm]
  rect 0.566x0.54 smd mask+0.051: 1(-0.433,0) 2(0.433,0)
  body extent -0.5,-0.25 0.5,0.25, height 0.36
SOD-123FL_L2.7-W1.8-LS3.8-RD [mm] "SMF5.0A"
  rect 1.4x1.2 smd: 1(-1.735,0) 2(1.735,0)
  silkscreen extent -1.6,-1 1.38,1
SOT-23-3_L3.0-W1.7-P0.95-LS2.9-BR [mil] "XC6206P182MR"
  rect 40.85x20.95 smd: 1(43.36,-37.4) 2(43.36,37.4) 3(-43.36,0)
  silkscreen extent -34,-60 34,60
SW-SMD_L3.9-W3.0-P4.45 [mm] "TS-1088R-02026"
  rect 1.23x1.36 smd: 1(-2.185,0) 2(2.185,0)
  silkscreen extent -2.03,-1.62 2.25,1.62, body extent -2.4,-1.45 2.4,1.45, height 1.95
TSSOP-24_L7.8-W4.4-P0.65-LS6.4-BL_1 [mm] "CD4067BMT/TR"
  oval 0.364x1.71 smd: 1(-3.575,-2.78) 2(-2.925,-2.78) 3(-2.275,-2.78) 4(-1.625,-2.78) 5(-0.975,-2.78) 6(-0.325,-2.78) 7(0.325,-2.78) 8(0.975,-2.78) 9(1.625,-2.78) 10(2.275,-2.78) 11(2.925,-2.78) 12(3.575,-2.78) 13(3.575,2.78) 14(2.925,2.78) 15(2.275,2.78) 16(1.625,2.78) 17(0.975,2.78) 18(0.325,2.78) 19(-0.325,2.78) 20(-0.975,2.78) 21(-1.625,2.78) 22(-2.275,2.78) 23(-2.925,2.78) 24(-3.575,2.78)
  silkscreen extent -4.42,-2.85 3.98,1.62, body extent -3.9,-3.2 3.9,3.2, height 1.2
USB-C-SMD_TYPE-C16PIN [mm]
  oval 1x2.1 hole 0.6 slot 1.7 at 90 deg: 1(-4.32,1.787) 2(4.32,1.787)
  oval 1x1.8 hole 0.6 slot 1.4 at 90 deg: 3(-4.32,-2.362) 4(4.32,-2.362)
  rect 0.6x1.15 smd: A1B12(-3.2,2.362) A4B9(-2.4,2.362) B1A12(3.2,2.362) B4A9(2.4,2.362)
  rect 0.3x1.15 smd: A5(-1.25,2.362) A6(-0.25,2.362) A7(0.25,2.362) A8(-1.75,2.362) B5(1.75,2.362) B6(0.75,2.362) B7(-0.75,2.362) B8(1.25,2.362)
  round 0.65 hole 0.65 unplated: ""(-2.89,1.288) ""(2.89,1.288)
  silkscreen extent -4.45,-5 4.45,0.52, body extent -4.47,-5.05 4.47,2.76, height 3.25
WLCSP-9_L1.3-W1.3-R3-C3-P0.40-TL [mm] "BMM350"
  round 0.2 smd paste-100 mask+0.051: A1(-0.4,0.4) A2(0,0.4) A3(0.4,0.4) B1(-0.4,0) B2(0,0) B3(0.4,0) C2(0,-0.4) C3(0.4,-0.4)
  round 0.2 smd mask+0.051: C1(-0.4,-0.4)
  silkscreen extent -1,-0.7 0.7,0.7, body extent -0.65,-0.65 0.65,0.65, height 0.53

## Part data
C1 C2 C3 C4 C5 C6 C7 C8 C9 C10 C11 C12 C13 C14 C15 C16 C17 C18 C19 C20 C21 C22 C23 C24 C25 C26 C27 C28 C29 C30 C31 C32 C33 C34 C35 C36 C37 C38 C39 C40 C41 C42 C43 C44 C45 C46 C47 C48 C49 C50 C51 C52 C53 C54 C55 C56 C57 C58 C59 C60 C61 C62: library part "Cap Semi", "Capacitor (Semiconductor SIM Model)", LatestRevisionDate=29-May-2009, LatestRevisionNote="IPC-7351 Footprint Added.", PackageDescription="Chip Capacitor", PackageReference=C1206, Published=8-Jun-2000, Publisher="Altium Limited"
P1 P3 P4-1 P4-2 P4-3 P4-4 P4-6 P4-7: "XDWF-0910-04P", LatestRevisionDate=17-Jul-2002, LatestRevisionNote="Re-released for DXP Platform.", Publisher="Altium Limited"
P2-1: "Header, 24-Pin", LatestRevisionDate=17-Jul-2002, LatestRevisionNote="Re-released for DXP Platform.", Publisher="Altium Limited"
P2-2: "Header, 30-Pin", LatestRevisionDate=17-Jul-2002, LatestRevisionNote="Re-released for DXP Platform.", Publisher="Altium Limited"
P4-5: "Header, 4-Pin", LatestRevisionDate=17-Jul-2002, LatestRevisionNote="Re-released for DXP Platform.", Publisher="Altium Limited"
P5: "Header, 2-Pin", LatestRevisionDate=17-Jul-2002, LatestRevisionNote="Re-released for DXP Platform.", Publisher="Altium Limited"
P6: "Header, 10-Pin", LatestRevisionDate=17-Jul-2002, LatestRevisionNote="Re-released for DXP Platform.", Publisher="Altium Limited"
R1 R2 R3 R4 R5 R6 R7 R8 R9 R10 R11 R12 R13 R14 R15 R16 R17 R18 R19 R20 R21 R22 R23 R24 R25 R26: library part Res2, "Resistor", LatestRevisionDate=17-Jul-2002, LatestRevisionNote="Re-released for DXP Platform.", PackageDescription="Axial Device, Thru-Hole; 2 Leads; 0.4 in Pin Spacing", PackageReference=AXIAL-0.4, Published=8-Jun-2000, Publisher="Altium Limited"
S1 S2: library part SW-PB, "TS-1088R-02026", LatestRevisionDate=17-Jul-2002, LatestRevisionNote="Re-released for DXP Platform.", PackageDescription="Switch; 2 Leads", PackageReference=SPST-2, Published=24-Mar-1999, Publisher="Altium Limited"
U1 U6: "No Description Available", Mfr_Name=STMicroelectronics, RefDes=RefDes, Type=Type
U7 U11: library part "AMS1117_3.3 SOT-89"
XT1 XT2: library part "8MHz 0.07% 3PIN_1", "CSTNE8M00GH5C000R0"

## Free pads (board coordinates)
  round 177.17 hole 90.55: 1(2940,4020) 1(5430,3035.75) 1(5430,4020)

## Via types
v1: diameter 22, hole 12, Top Layer to Bottom Layer, 205 vias
v2: diameter 35, hole 22, Top Layer to Bottom Layer, 102 vias

## Nets (pads, with @x,y where several pads share a name; then routed paths per layer and width w, separated by ;. In a path a pad name is that pad's centre, name@x,y a point inside that pad or via, vN(x,y) a via of type N, cw(c..) or ccw(c..) an arc to the next point about the centre after c; other vN are vias at no path point)
1.8V: C15.2 C19.2 U2.2 U3.C1 | length 801.9
  Top Layer w6: C19.2@3774.25,3638.22 3777.47,3635 3794.25,3635 3824.25,3665 U3.C1@3833.5,3665 ; U2.2@3890,3945.05 U2.2@3890,3955
  Top Layer w15: C19.2@3774.25,3638.22 3774.25,3610 3834.25,3550 3970,3550 4005,3585 4005,3732.74 3874.38,3863.36 C15.2@3874.38,3893.36 3874.38,3929.42 U2.2@3890,3945.05
+5V: C14.2 C16.2 C17.2 C46.2 C47.2 C55.2 D1.2 LED1.4 P1.1 P3.1 P4-1.1 P4-2.1 P4-3.1 P4-4.1 P4-5.4 P4-6.1 P4-7.1 P5.1 P6.4 U2.3 U7.3 U9.3 U9.9 U10.A4B9 U10.B4A9 U11.3 | length 3549.9
  Top Layer w6: P1.1@3029.29,3830 P1.1@3030.49,3831.2 ; C14.2@3762.47,4040 C14.2@3762.6,4040.14 ; C55.2@4745,1996.78 C55.2@4741.77,2000 4747.02,2005.25 U9.3@4805.83,2005.25 ; U9.9@4920,1985.63 4929.84,1985.63 4955,1960.47 v2(4955,1960) ; P5.1@5195.19,1940 P5.1@5196.26,1938.92 ; P5.1@5196.26,2321.07 P5.1@5200,2324.82 ; D1.2@5196.26,2470.43 D1.2@5206.69,2460 ; U7.3@5280.68,3538.64 U7.3@5282.51,3540.47
  Top Layer w10: v2@2886.1,2666.1 P6.4@2995.63,2666.1
  Top Layer w15: v2@2950.95,2069.05 P4-7.1@3025.49,2069.05 ; v2(2960,3830) P1.1@3029.29,3830 ; v2(3015,3590) 3077.08,3652.08 C17.2@3110.54,3652.08 C16.2@3110.54,3602.08 3107.84,3599.38 U11.3@3107.84,3537.76 ; P4-6.1@3025.49,2404.05 v2(2955,2404.05) 3021.97,2471.03 LED1.4@3248.34,2471.03 ; U10.A4B9@3294.28,2113.36 3298.59,2109.05 3298.59,2086.41 3320,2065 3320,1988.79 3305,1973.79 v2(3305,1970) ; v2(3475,1970) 3455,1990 3455,2060.7 3478.94,2084.64 3478.94,2109.05 U10.B4A9@3483.26,2113.36 ; P4-4.1@3559.05,3943.72 v2(3559.05,4015) ; v2(3705,4040) C14.2@3762.47,4040 ; C14.2@3764.18,4041.72 U2.3@3852.6,4041.72 ; P4-5.4@4180,3040 4324.51,3184.51 4324.51,3444.15 4371.53,3491.17 4406.17,3491.17 v2(4410,3495) ; P4-3.1@4246.1,3943.72 v2(4246.1,4015) ; v2(4745,1940) C55.2@4745,1996.78 ; P4-2.1@4934.06,3943.72 v2(4934.06,4015) ; U7.3@5282.51,3540.47 C46.2@5357.95,3540.47 C47.2@5410,3540.47 v2(5410,3605) ; P3.1@5339.51,3713.09 v2(5415,3713.09) ; P4-1.1@5344.51,2658.8 v1(5415,2658.8)
  Top Layer w20: v2(5035,1940) P5.1@5195.19,1940 ; P5.1@5195,2329.82 P5.1@5196.26,2328.55 ; P5.1@5196.26,2321.07 P5.1@5196.26,2328.55 ; D1.2@5196.26,2470.43 5196.81,2470.43 5200,2473.62 v2(5200,2540) ; P5.1@5200,2324.82 P5.1@5196.26,2328.55 ; D1.2@5206.69,2460 5196.26,2449.57 P5.1@5196.26,2328.55
  Bottom Layer w15: v2(4410,3495) v2(4410,3990)
  other v2: 2950,2070 2885,2666.1
ADC1_INP3: R7.2 U1.30 U5-1.1 | length 614.3
  Top Layer w6: U1.30@3497.52,2719.88 3495,2717.36 3495,2646.72 3640.72,2501 3854,2501 3886.53,2468.47 R7.2@3886.53,2450 ; U5-1.1@3886.1,2394.14 3886.1,2449.06 R7.2@3887.04,2450
ADC1_INP4: R8.2 U1.32 U5-2.1 | length 997.2
  Top Layer w6: U1.32@3536.89,2719.88 3536.89,2751.89 3575,2790 v1(3620,2790) ; U5-2.1@4265,2394.14 4265,2447.96 4270,2452.96 v1(4270,2480)
  Bottom Layer w6: v1(3620,2790) 3890,2790 4200,2480 v1(4270,2480)
BMM350_INT: U1.62 U3.A1 | length 1135.5
  Top Layer w6: v1(3700,3070) 3906.22,3276.22 3906.22,3382.94 3960,3436.72 v1(3960,3440) ; v1(3805,3710) 3808.06,3706.94 3823.06,3706.94 U3.A1@3833.5,3696.5 ; v1(3885,3005) 3885.16,3005.16 3959.96,3005.16 U1.62@3960.12,3005.32
  Bottom Layer w6: v1(3700,3070) 3700,3065.96 3760.96,3005 v1(3885,3005) ; v1(3805,3710) 3960,3555 v1(3960,3440)
COM_SPI1_MISO: P6.6 U6.30 | length 3645.6
  Top Layer w6: v1(2945,2625) 2945.96,2625.96 2994.86,2625.96 P6.6@2995.63,2626.73 ; v1(4400,2735) 4400,2450 v1(4420,2430) ; v1(4596.9,2985.16) 4601.23,2985.16 4609.04,2992.97 4744.94,2992.97 4867.48,3115.51 U6.30@4867.48,3330.12
  Bottom Layer w6: v1(2945,2625) 2945.97,2625.97 2976.15,2625.97 3080,2522.11 3080,2458.94 3311.94,2227 3586.94,2227 3841.94,1972 4521.49,1972 4552,2002.51 4552,2298 v1(4420,2430) ; v1(4400,2735) 4400,2775 4595.39,2970.39 4595.39,2983.65 v1(4596.9,2985.16)
COM_SPI1_MOSI: P6.5 U6.31 | length 3575.3
  Top Layer w6: P6.5@2995.63,2646.42 2996.34,2645.71 3029.29,2645.71 v1(3030,2645) ; v1(4380,2760) 4380,2439.33 4385,2434.33 v1(4385,2430) ; v1(4579.43,3007.04) 4580.14,3006.33 4741.33,3006.33 4847.8,3112.8 U6.31@4847.8,3330.12
  Bottom Layer w6: v1(3030,2645) 3092,2583 3092,2463.91 3316.91,2239 3591.91,2239 3845.91,1985 4516.47,1985 4540,2008.53 4540,2275 v1(4385,2430) ; v1(4380,2760) 4380,2790 4576.9,2986.9 4576.9,3004.51 v1(4579.43,3007.04)
COM_SPI1_NSS: P6.8 U6.28 | length 3653.7
  Top Layer w6: v1(2948.88,2583.45) 2950.84,2585.41 2993.68,2585.41 P6.8@2995.63,2587.36 ; v1(4440,2695) 4440,2480 4486.94,2433.06 4496.94,2433.06 v1(4500,2430) ; v1(4640,2950) 4640.54,2950 4659.5,2968.97 4754.88,2968.97 4906.85,3120.94 U6.28@4906.85,3330.12
  Bottom Layer w6: v1(2948.88,2583.45) 2951.55,2583.45 3048.29,2486.71 3048.29,2456.71 3302,2203 3577,2203 3838,1942 4562,1942 4580,1960 4580,2340 4503.06,2416.94 4503.06,2426.94 v1(4500,2430) ; v1(4440,2695) 4440,2750 v1(4640,2950)
COM_SPI1_SCK: P6.7 U6.29 | length 3603.5
  Top Layer w6: v1(2965.53,2605.96) 2966.08,2606.51 2995.09,2606.51 P6.7@2995.63,2607.05 ; v1(4420,2715) 4420,2465 v1(4455,2430) ; v1(4620.5,2970.1) 4621.15,2970.1 4632.02,2980.97 4749.91,2980.97 4887.17,3118.22 U6.29@4887.17,3330.12
  Bottom Layer w6: v1(2965.53,2605.96) 2967.86,2605.96 3065,2508.83 3065,2456.97 3306.97,2215 3581.97,2215 3836.97,1960 4535,1960 4565,1990 4565,2320 v1(4455,2430) ; v1(4420,2715) 4420,2755 4619.66,2954.66 4619.66,2969.25 v1(4620.5,2970.1)
COM_UART4_DE: U6.77 U8-1.2 U8-1.3 | length 786.5
  Top Layer w6: U6.77@4493.46,2719.88 4496.46,2722.88 4496.46,2745.57 4506.95,2756.05 v1(4506.95,2760.38) ; v1(4645,2885) 4848.72,2885 5031.52,2702.2 U8-1.3@5094.39,2702.2 U8-1.2@5094.39,2727.8
  Bottom Layer w6: v1(4506.95,2760.38) 4630.14,2883.57 4643.57,2883.57 v1(4645,2885)
COM_UART4_RX: U6.95 U8-1.1 | length 298
  Top Layer w6: U6.95@4847.8,2719.88 4848.9,2720.98 4848.9,2763.9 v1(4850,2765) ; v1(5065,2750) 5066.69,2751.69 5092.7,2751.69 U8-1.1@5094.39,2753.38
  Bottom Layer w6: v1(4850,2765) 4865,2750 v1(5065,2750)
COM_UART4_TX: U6.96 U8-1.4 | length 278.3
  Top Layer w6: U6.96@4867.48,2719.88 4867.48,2676.85 v1(4869.33,2675) ; v1(5000,2685) 5060,2685 5068.38,2676.62 U8-1.4@5094.39,2676.62
  Bottom Layer w6: v1(4869.33,2675) 4879.33,2685 v1(5000,2685)
COM_UART5_DE: U6.65 U8-2.2 U8-2.3 | length 1453.3
  Top Layer w6: U6.65@4404.88,2985.63 4405.2,2985.31 4449.69,2985.31 4506.03,2928.97 4748.82,2928.97 4930.85,3111 4930.85,3236.15 4994.92,3300.22 4995.22,3300.22 5075,3380 5075,3631.97 5033.88,3673.09 4893.83,3673.09 4890.31,3676.6 4890.31,3691.88 U8-2.3@4887.8,3694.39 U8-2.2@4862.2,3694.39
COM_UART5_RX: U6.83 U8-2.1 | length 1398.4
  Top Layer w6: v1(4610,2765) 4610.79,2764.21 4610.79,2720.67 U6.83@4611.57,2719.88 ; v1(4690,2948.97) 4691.03,2950 4752.88,2950 4918.85,3115.97 4918.85,3241.12 4989.95,3312.22 4990.25,3312.22 5063,3384.97 5063,3627 5030,3660 4850,3660 4836.62,3673.38 U8-2.1@4836.62,3694.39
  Bottom Layer w6: v1(4610,2765) 4690,2845 v1(4690,2948.97)
COM_UART5_TX: U6.80 U8-2.4 | length 1432.1
  Top Layer w6: U6.80@4552.52,2719.88 4553.76,2721.12 4553.76,2763.76 v1(4555,2765) ; v1(4629.93,2855.07) 4629.93,2856.66 4615,2871.59 4615,2898.28 4631.72,2915 4751.82,2915 4945,3108.18 4945,3233.33 4999.89,3288.22 5000.19,3288.22 5091,3379.03 5091,3639 5044.91,3685.09 4915.89,3685.09 4913.38,3687.6 U8-2.4@4913.38,3694.39
  Bottom Layer w6: v1(4555,2765) 4555,2784.48 4625.6,2855.07 v1(4629.93,2855.07)
COM_UART7_DE: U6.39 U8-3.2 U8-3.3 | length 803
  Top Layer w6: U8-3.2@4172.2,3694.39 U8-3.3@4197.8,3694.39 4198.9,3693.29 4198.9,3656.1 v1(4200,3655) ; v1(4370,3405) 4370,3386.97 4471.97,3285 4675,3285 4690.31,3300.32 U6.39@4690.31,3330.12
  Bottom Layer w6: v1(4200,3655) 4340,3515 4340,3435 v1(4370,3405)
COM_UART7_RX: U6.89 U8-3.1 | length 1217.6
  Top Layer w6: v1(4145,3660) 4145.81,3660.81 4145.81,3693.58 U8-3.1@4146.62,3694.39 ; v1(4350,3360) 4350,3358.33 4680,3028.33 v1(4680,3026.33) ; U6.89@4729.69,2719.88 4729.84,2720.04 4729.84,2794.84 v1(4730,2795)
  Bottom Layer w6: v1(4145,3660) 4305,3500 4305,3405 4328.47,3381.53 v1(4350,3360) ; v1(4680,3026.33) 4681.81,3024.52 4681.81,3011.86 4730,2963.67 v1(4730,2795)
COM_UART7_TX: U6.90 U8-3.4 | length 1217.1
  Top Layer w6: U8-3.4@4223.38,3694.39 4223.38,3687.6 4241.94,3669.04 4241.94,3658.06 v1(4245,3655) ; v1(4370,3455) 4368.23,3455 4345,3431.77 4345,3393.28 4710,3028.28 v1(4710,3026.33) ; U6.90@4749.37,2719.88 4749.69,2720.2 4749.69,2759.68 v1(4750,2760)
  Bottom Layer w6: v1(4245,3655) 4372.92,3527.08 4372.92,3457.92 v1(4370,3455) ; v1(4710,3026.33) 4711.67,3024.66 4711.67,3006.33 4750,2968 v1(4750,2760)
COM_UART8_DE: U6.62 U8-4.2 U8-4.3 | length 1333.8
  Top Layer w6: U8-4.2@3487.2,3694.39 U8-4.3@3512.8,3694.39 3512.8,3686.19 3513.9,3685.09 3513.9,3671.1 v1(3515,3670) ; U6.62@4404.88,3044.68 4405.04,3044.84 4454.84,3044.84 v1(4455,3045)
  Bottom Layer w6: v1(3515,3670) 3515,3671.04 3553.96,3710 3635,3710 4300,3045 v1(4455,3045)
COM_UART8_RX: U6.97 U8-4.1 | length 2026
  Top Layer w6: v1(3461.62,3670) U8-4.1@3461.62,3694.39 ; v1(4885,2770) 4886.08,2768.92 4886.08,2720.96 U6.97@4887.17,2719.88
  Bottom Layer w6: v1(3461.62,3670) 3513.62,3722 3643,3722 4270,3095 4750,3095 4885,2960 v1(4885,2770)
COM_UART8_TX: U6.98 U8-4.4 | length 1935.1
  Top Layer w6: U8-4.4@3538.38,3694.39 3538.38,3692.51 3540.89,3690 v1(3590,3690) ; v1(4865,2820) 4906.85,2778.15 U6.98@4906.85,2719.88
  Bottom Layer w6: v1(3590,3690) 3635,3690 4300,3025 4535,3025 4591.57,3081.57 4741.46,3081.57 4865,2958.03 v1(4865,2820)
COM_USART2_RX: P4-6.2 U6.87 | length 2664.7
  Top Layer w6: P4-6.2@3025.49,2364.68 3085.32,2364.68 3165,2285 v1(3165,2185) ; U6.87@4690.31,2719.88 4692.66,2717.54 4692.66,2227.34 v1(4695,2225)
  Bottom Layer w6: v1(3165,2185) 3185,2165 3564.09,2165 3823.09,1906 4576.91,1906 4625,1954.09 4625,2130 4691.94,2196.94 4691.94,2221.94 v1(4695,2225)
COM_USART2_TX: P4-6.3 U6.86 | length 2689.6
  Top Layer w6: P4-6.3@3025.49,2325.32 3084.68,2325.32 3140,2270 v1(3140,2155) ; U6.86@4670.63,2719.88 4672.81,2717.7 4672.81,2186.86 4678.13,2181.55 4679.12,2181.55 4690.67,2170 v1(4695,2170)
  Bottom Layer w6: v1(3140,2155) 3142,2153 3559.12,2153 3818.12,1894 4584,1894 4695,2005 v1(4695,2170)
COM_USART3_RX: P4-7.2 U6.79 | length 2740.2
  Top Layer w6: P4-7.2@3025.49,2029.68 3025.8,2030 v1(3080,2030) ; U6.79@4532.83,2719.88 4535.83,2716.88 4535.83,2694.34 4542.79,2687.38 4627.62,2687.38 4650,2665 v1(4650,2240)
  Bottom Layer w6: v1(3080,2030) 3080,2135 3155,2210 3248.03,2210 3280.03,2178 3568.06,2178 3828.06,1918 4571.94,1918 4610,1956.06 4610,2135 4655,2180 4655,2230.67 4650,2235.67 v1(4650,2240)
COM_USART3_TX: P4-7.3 U6.78 | length 2816.5
  Top Layer w6: v1(2970,1990) 3025.17,1990 P4-7.3@3025.49,1990.32 ; U6.78@4513.15,2719.88 4516.15,2716.88 4516.15,2694.34 4540.49,2670 4615,2670 4630,2655 4630,2231.31 4635,2226.31 v1(4635,2205)
  Bottom Layer w6: v1(2970,1990) 2970,2045 3150,2225 3250,2225 3285,2190 3573.03,2190 3833.03,1930 4566.97,1930 4595,1958.03 4595,2140 4635,2180 v1(4635,2205)
COM_USART6_RX: U6.64 U9.4 | length 1548.3
  Top Layer w6: v1(4320,2615) 4280,2655 4280,2780 4240,2820 4240,2932.48 4312.84,3005.32 U6.64@4404.88,3005.32 ; v1(4775,1985) 4775.28,1985.29 4805.53,1985.29 U9.4@4805.82,1985.57
  Bottom Layer w6: v1(4320,2615) 4318.49,2615 4308.49,2625 4281.72,2625 4270,2613.28 4270,2596.72 4336.72,2530 4465,2530 4775,2220 v1(4775,1985)
COM_USART6_TX: U6.63 U9.5 | length 1537.4
  Top Layer w6: v1(4290,2605) 4267,2628 4267,2771.94 4228,2810.94 4228,2937.45 4315.55,3025 U6.63@4404.88,3025 ; v1(4800,1955) 4801.92,1956.92 4833.39,1956.92 U9.5@4833.39,1958.07
  Bottom Layer w6: v1@4290.3,2604.7 4345,2550 4464.45,2550 4800,2214.45 v1(4800,1955)
GND: C1.1 C2.1 C3.2 C4.1 C5.1 C6.2 C7.2 C8.2 C9.1 C10.1 C11.1 C12.1 C13.1 C14.1 C15.1 C16.1 C17.1 C18.1 C19.1 C20.1 C21.1 C22.2 C23.2 C24.1 C25.2 C26.2 C27.1 C28.2 C29.2 C30.1 C31.2 C32.2 C33.1 C34.1 C35.2 C36.1 C37.1 C38.2 C39.2 C40.2 C41.2 C42.1 C43.1 C44.1 C45.1 C46.1 C47.1 C48.1 C49.1 C50.1 C51.1 C52.1 C53.1 C54.1 C55.1 C56.1 C57.1 C58.1 C59.2 C60.2 C61.1 C62.2 D1.1 LED1.2 P1.4 P3.4 P4-1.4 P4-2.4 P4-3.4 P4-4.4 P4-5.1 P4-6.4 P4-7.4 P5.2 P6.1 R1.1 R7.1 R8.1 R9.1 R13.1 R16.1 R19.1 R22.1 R25.1 R26.1 S1.2 S2.2 U1.10 U1.19 U1.26 U1.49 U1.74 U1.99 U2.1 U3.B1 U3.B2 U3.C3 U4-1.6 U4-1.7 U4-1.10 U4-1.11 U4-2.6 U4-2.7 U4-2.10 U4-2.11 U4-3.6 U4-3.7 U4-3.10 U4-3.11 U4-4.6 U4-4.7 U4-4.10 U4-4.11 U5-1.12 U5-1.15 U5-2.12 U5-2.15 U6.10 U6.19 U6.26 U6.49 U6.74 U6.99 U7.1 U8-1.5 U8-2.5 U8-3.5 U8-4.5 U9.2 U10.1 U10.2 U10.3 U10.4 U10.A1B12 U10.B1A12 U11.1 XT1.2 XT2.2 | length 8944.3
  Top Layer w6: P6.1@2995.55,2725.08 P6.1@2995.63,2725.16 ; C8.2@3208.3,2740 C8.2@3213.22,2740 ; C60.2@3213.53,2888.63 3218.45,2888.63 3226.08,2896.26 3226.08,2902.1 3232.24,2908.26 3348.51,2908.26 U1.19@3349.88,2906.89 ; C9.1@3255,3176.14 3255,3171.22 3262.63,3163.59 3267.55,3163.59 3291.44,3139.7 3291.44,3119.95 3324.34,3087.06 3346.88,3087.06 U1.10@3349.88,3084.06 ; U10.A1B12@3262.78,2113.36 3271.59,2122.17 3271.59,2141.62 3304.97,2175 R25.1@3305.47,2175 ; v2(3291.6,2347.06) v2@3291.66,2347.12 ; S1.2@3310,2633.98 S1.2@3311.02,2635 ; v2(3358.76,2668.76) 3358.93,2668.93 v2@3360,2668.93 ; C13.1@3396.14,3415 3396.14,3398.04 3436.15,3358.03 3436.15,3332.43 U1.99@3438.46,3330.12 ; C10.1@3398.93,2630 C10.1@3403.86,2630 3403.86,2658.86 3418.78,2673.78 U1.26@3418.78,2719.88 ; R26.1@3491.74,2175 3492.25,2175 3514.75,2152.5 U10.B1A12@3514.75,2113.36 ; U4-3.6@3498.07,2345.69 U4-3.7@3517.76,2345.69 3517.76,2298.39 C27.1@3521.14,2295 ; U4-1.6@3498.07,3526.79 U4-1.7@3517.76,3526.79 3517.76,3478.39 C21.1@3521.14,3475 ; U8-4.5@3538.38,3805.61 3580.61,3805.61 v2(3595,3820) ; U4-3.10@3547.76,2395.39 U4-3.11@3547.76,2415.08 3596.69,2415.08 C28.2@3600,2411.78 ; U4-1.10@3547.76,3576.49 U4-1.11@3547.76,3596.18 3599.41,3596.18 C22.2@3600,3596.78 ; U10.2@3554.96,2101.84 3558.85,2097.95 U10.2@3558.85,2090.72 ; R22.1@3592.04,3870 R22.1@3595,3867.04 ; v2@3630,3643.28 v2(3630,3645) ; C19.1@3773.11,3680 C19.1@3774.25,3681.14 ; C19.1@3774.64,3680.75 U3.B1@3833.5,3680.75 U3.B2@3849.25,3680.75 ; U2.1@3814.55,3955.65 U2.1@3815.2,3955 ; C4.1@3816.14,2580 C4.1@3820,2583.86 ; U3.C3@3865,3665 3870.39,3659.61 C20.1@3870.39,3625 C20.1@3870,3624.61 ; U1.49@3871.54,2719.88 3871.54,2632.32 C11.1@3873.86,2630 ; U5-1.12@3885,2111.54 U5-1.12@3886.1,2112.64 ; C18.1@3924.25,3638.93 C18.1@3924.25,3643.86 ; U1.74@3960.12,3241.54 4043.68,3241.54 C12.1@4052,3249.86 ; C5.1@4103.71,3249.86 C5.1@4105,3251.14 C5.1@4110,3251.14 ; U5-1.15@4105,2163.82 4105.59,2164.41 4149.41,2164.41 v1(4150,2165) ; U8-3.5@4223.38,3805.61 4260.61,3805.61 v2(4280,3825) ; R8.1@4232.96,2450 4235,2452.04 v2(4235,2506.5) ; v2(4235,2080) 4253.74,2098.74 4253.74,2108.79 4257.59,2112.64 U5-2.12@4265,2112.64 ; R19.1@4277.04,3870 R19.1@4280,3867.04 ; C45.1@4310,2816.14 4358.85,2816.14 4366.54,2808.46 U6.74@4404.88,2808.46 ; U5-2.15@4483.9,2163.82 4510.4,2163.82 4535,2139.22 4535,2099.33 4512.99,2077.31 4492.31,2077.31 v2(4490,2075) ; U6.49@4493.46,3330.12 4493.46,3373.46 4506.15,3386.14 C44.1@4506.15,3420 ; C36.1@4556.15,3470 C36.1@4560,3466.14 ; C55.1@4698.85,2000 4698.85,1948.67 4737.52,1910 C56.1@4803.85,1910 ; 4698.85,2024.94 U9.2@4805.83,2024.94 ; S2.2@4756.02,2575 S2.2@4761.02,2580 ; U4-4.6@4876.02,2345.69 U4-4.7@4895.71,2345.69 4895.71,2300.44 C30.1@4901.15,2295 ; U4-2.6@4876.02,3526.79 U4-2.7@4895.71,3526.79 4895.71,3475.44 C24.1@4896.15,3475 ; U8-2.5@4913.38,3805.61 4950.61,3805.61 v2(4970,3825) ; C61.1@4913.85,2630 4913.85,2663.67 4926.54,2676.35 U6.99@4926.54,2719.88 ; U4-4.10@4925.71,2395.39 4967.37,2395.39 4975,2403.02 C31.2@4975,2406.78 4975,2407.45 4967.37,2415.08 U4-4.11@4925.71,2415.08 ; U4-2.10@4925.71,3576.49 U4-2.11@4925.71,3596.18 4974.41,3596.18 C25.2@4975,3596.78 ; U6.26@4946.22,3330.12 4946.22,3373.09 4956.15,3383.01 C43.1@4956.15,3420 ; U6.10@5015.12,2965.94 5016.54,2964.52 5045.48,2964.52 5073.99,2936.01 5073.99,2881.01 5096.15,2858.86 C42.1@5115,2858.86 ; U6.19@5015.12,3143.11 5056.83,3143.11 5101.84,3098.11 5148.11,3098.11 5153.88,3103.88 5153.88,3112.37 C41.2@5161.77,3120.26 ; v2(5205,2630) 5205,2676.01 U8-1.5@5205.61,2676.62 ; D1.1@5352.13,2452.87 D1.1@5353.74,2454.48 ; P5.2@5353.74,1938.92 P5.2@5354.81,1940
  Top Layer w10: v2(2945,2750) 2969.92,2725.08 P6.1@2995.55,2725.08 ; v2(3885,2075) U5-1.12@3885,2111.54
  Top Layer w15: v2(2945,2750) 2950.41,2750 2960.41,2760 C3.2@3073.22,2760 ; v2@2950.95,1950.94 P4-7.4@3025.49,1950.94 ; v2(2955,2285.95) P4-6.4@3025.49,2285.95 ; v2(2960,3713.09) P1.4@3030.49,3713.09 ; C1.1@3133.86,2967.2 3134.43,2967.77 3134.43,3014.43 v2(3135,3015) ; v2@3133.86,3015.8 C2.1@3133.86,3064.4 ; v2(3135,3165) 3170,3200 3231.14,3200 3246.95,3184.2 3251.87,3184.2 3255,3181.07 C9.1@3255,3176.14 ; v2@3135.26,3017.2 XT1.2@3245,3017.2 ; C17.1@3153.46,3652.08 C16.1@3153.46,3602.08 3179.41,3602.08 3225.95,3555.53 U11.1@3225.95,3537.76 3231.42,3543.23 C57.1@3292.32,3543.23 ; v2(3165,2720) 3188.3,2720 C8.2@3208.3,2740 ; C8.2@3213.53,2740.3 C59.2@3213.53,2838.63 C60.2@3213.53,2888.63 ; U10.1@3218.69,2090.72 3228.18,2100.21 3258.47,2100.21 3262.78,2104.52 U10.A1B12@3262.78,2113.36 ; v2@3291.66,2347.12 LED1.2@3291.66,2398.97 ; v2(3292.32,3595) C57.1@3292.32,3543.23 ; S1.2@3310,2633.98 3310,2636.54 3339.63,2666.17 3356.17,2666.17 v2(3358.76,2668.76) ; C58.1@3342.32,3543.23 C57.1@3292.32,3543.23 ; v2@3358.93,2668.93 v2@3359.47,2669.47 ; v2@3360,2668.93 C10.1@3398.93,2630 ; C13.1@3396.14,3415 3398.89,3417.75 3432.25,3417.75 v2(3435,3420.5) ; v2(3405,3715) C53.1@3405,3753.86 ; P4-4.4@3440.95,3943.72 v2(3440.95,4015) ; U10.B1A12@3514.75,2113.36 3514.75,2104.53 3519.06,2100.22 3549.35,2100.22 U10.2@3558.85,2090.72 ; C27.1@3521.14,2295 v2(3580,2295) ; C21.1@3521.14,3475 v2(3560,3475) 3560,3473.25 3577.04,3456.21 R1.1@3577.04,3405 ; v2(3595,3820) R22.1@3595,3867.04 ; C28.2@3600,2411.78 C29.2@3650,2411.78 v2(3650,2450) ; C22.2@3600,3596.78 C23.2@3650,3596.78 3650,3623.28 v2@3630,3643.28 ; v2(3730,3680) C19.1@3773.11,3680 ; v2(3750,3920) 3750,3920.53 3778.02,3948.55 3778.02,3967.94 ; C14.1@3762.6,3997.22 3765.73,3994.09 3765.73,3980.23 3778.02,3967.94 ; v2(3780,2580) C4.1@3816.14,2580 ; v2(3800,2450) R7.1@3852.96,2450 ; U2.1@3814.55,3955.65 3790.31,3955.65 3778.02,3967.94 ; U2.1@3815.2,3955 3815.2,3945.05 3818.17,3942.08 3822.67,3942.08 3831.45,3933.29 C15.1@3831.45,3893.36 ; C4.1@3820,2583.13 3823.13,2580 C7.2@3873.22,2580 ; v2(3870,3585) 3870.2,3585.2 3870.2,3624.41 C20.1@3870,3624.61 ; C20.1@3870.39,3625 3910.32,3625 C18.1@3924.25,3638.93 ; C7.2@3873.86,2580.63 C11.1@3873.86,2630 ; C12.1@4052,3249.86 4077.86,3249.86 ; v2(4090,3715) C52.1@4090,3753.86 ; C5.1@4103.71,3249.86 4077.86,3249.86 ; v2(4110,3305) 4077.86,3272.86 4077.86,3249.86 ; P4-3.4@4127.99,3943.72 v2(4127.99,4015) ; v2(4275,2840) 4277.98,2840 4293.79,2824.2 4306.87,2824.2 4310,2821.07 C45.1@4310,2816.14 ; v2(4280,3825) R19.1@4280,3867.04 ; C37.1@4310,2921.14 v2(4310,2965) ; C35.2@4478.23,2580 4478.23,2608.22 4510,2640 v2(4545,2640) ; C44.1@4506.15,3420 C62.2@4506.15,3470 4531.15,3470 ; v2(4535,3500) 4533.66,3498.66 4533.66,3472.52 4531.15,3470 ; C36.1@4556.15,3470 4531.15,3470 ; v2(4657.64,2095) 4657.64,2091.29 4693.93,2055 C54.1@4698.85,2055 4698.85,2024.94 C55.1@4698.85,2000 ; S2.2@4761.02,2580 v2(4885,2580) 4885,2627.05 4887.95,2630 ; v2(4780,3715) C51.1@4780,3753.86 ; P4-2.4@4815.94,3943.72 v2(4815.94,4015) ; R9.1@4862.04,2630 4887.95,2630 ; C24.1@4896.15,3475 4930,3475 v2(4950,3495) ; C30.1@4901.15,2295 v2(4940,2295) ; C61.1@4913.85,2630 4887.95,2630 ; C43.1@4956.15,3420 v2(5005,3420) ; v2(4960,3631.5) 4963.5,3635 5013.23,3635 5024.22,3624 5024.22,3597.55 C26.2@5025,3596.78 C25.2@4975,3596.78 ; v2(4970,3825) R16.1@4970,3867.04 ; C31.2@4975,2406.78 C32.2@5025,2406.78 v2(5025,2465) ; C42.1@5115,2858.86 v2(5115,2810) C50.1@5158.85,2810 ; XT2.2@5130,3017.8 v2(5241.15,3017.8) ; C41.2@5161.77,3120.26 C40.2@5161.77,3170 C38.2@5161.77,3220 ; C39.2@5161.77,3270 C38.2@5161.77,3220 ; v2(5205,2630) 5210.41,2630 5214.49,2625.92 R13.1@5270,2625.92 ; C34.1@5241.15,2970.6 v2(5241.15,3017.8) ; C33.1@5241.15,3065 v2(5241.15,3017.8) ; C49.1@5259.4,3297.35 5260,3296.75 v2(5260,3250) 5230,3220 C38.2@5161.77,3220 ; C49.1@5260,3297.95 C48.1@5260,3350 5263.13,3353.13 5271.89,3353.13 5280.68,3361.92 U7.1@5280.68,3420.53 5286.28,3426.13 5321.13,3426.13 5358.75,3463.75 5358.75,3496.75 C46.1@5357.95,3497.55 C47.1@5410,3497.55 ; P3.4@5339.51,3831.2 v2(5415,3831.2) ; P4-1.4@5344.51,2776.91 v1(5415,2776.91)
  Top Layer w20: v2@5352.13,2542.13 v2@5353.74,2543.74 ; D1.1@5353.74,2449.57 P5.2@5353.74,2321.07 P5.2@5355,2322.34 ; D1.1@5353.74,2454.48 v2(5353.74,2540) v2@5353.74,2543.74 ; v2@5353.74,2545 v2@5353.74,2543.74 ; P5.2@5354.81,1940 v2(5505,1940) ; v2@5355,2545 v2@5353.74,2543.74
  other v2: 2950,1950
I2C1_SCL: R5.2 U1.95 U3.A3 | length 1010
  Top Layer w6: v1(3515,3440) 3517.82,3437.18 3517.82,3330.74 U1.95@3517.2,3330.12 ; v1(3655.32,3435) 3698.28,3435 3730,3466.72 3730,3615 3680,3665 3680,3740 3750,3810 3884.25,3810 3899.25,3795 3899.25,3755.42 3885.37,3741.53 3872.82,3741.53 R5.2@3869.25,3737.96 3865,3733.71 U3.A3@3865,3696.5
  Bottom Layer w6: v1(3515,3440) 3517.5,3437.5 3652.82,3437.5 v1(3655.32,3435)
I2C1_SDA: R6.2 U1.96 U3.A2 | length 800.1
  Top Layer w6: U1.96@3497.52,3330.12 3497.67,3330.27 3497.67,3399.85 v1(3497.82,3400) ; v1(3655.32,3405) 3685.25,3405 3742,3461.75 3742,3619.97 3695,3666.97 3695,3705 3708.12,3718.12 3763.12,3718.12 3782.96,3737.96 R6.2@3829.25,3737.96 3836.14,3731.07 3836.14,3722.36 3849.25,3709.25 U3.A2@3849.25,3696.5
  Bottom Layer w6: v1(3497.82,3400) 3500.32,3402.5 3652.82,3402.5 v1(3655.32,3405)
ICM1_INT1: U1.98 U4-1.4 | length 320.3
  Top Layer w6: v1(3395,3460) 3396.51,3460 3406.51,3450 3455,3450 3465,3440 3465,3376.34 3458.15,3369.49 U1.98@3458.15,3330.12 ; v1(3410,3540) 3411.44,3538.56 3446.95,3538.56 U4-1.4@3448.39,3537.12 ; U4-1.4@3438.62,3534.61 U4-1.4@3441.13,3537.12
  Bottom Layer w6: v1(3395,3460) 3410,3475 v1(3410,3540)
ICM1_INT2: U1.97 U4-1.9 | length 352.1
  Top Layer w6: U1.97@3477.83,3330.12 3477.82,3418.5 3485,3425.67 v1(3485,3430) ; v1(3515,3570) 3519.33,3570 3530,3559.33 3545.24,3559.33 U4-1.9@3547.76,3556.81
  Bottom Layer w6: v1(3485,3430) 3485,3491.31 3465,3511.31 3465,3573.28 3474.72,3583 3499.72,3583 3512.72,3570 v1(3515,3570)
ICM2_INT1: U1.71 U4-2.4 | length 1093.4
  Top Layer w6: U1.71@3960.12,3182.48 4102.48,3182.48 4103.67,3183.67 4128.67,3183.67 4236.91,3291.91 4236.91,3428.88 4345.15,3537.12 U4-2.4@4826.34,3537.12
ICM2_INT2: U1.67 U4-2.9 | length 1155.9
  Top Layer w6: U1.67@3960.12,3103.74 4143.74,3103.74 v1(4285,3245) ; v1(4890,3560) 4891.59,3558.41 4924.12,3558.41 U4-2.9@4925.71,3556.81
  Bottom Layer w6: v1(4285,3245) 4361.97,3245 4671.97,3555 4880.67,3555 4885.67,3560 v1(4890,3560)
ICM3_INT1: U1.31 U4-3.4 | length 441
  Top Layer w6: v1(3415,2355) 3415.51,2355.51 3447.88,2355.51 U4-3.4@3448.39,2356.02 ; v1(3515,2655) 3516.1,2656.1 3516.1,2718.78 U1.31@3517.2,2719.88
  Bottom Layer w6: v1(3415,2355) 3415,2465 3515,2565 v1(3515,2655)
ICM3_INT2: U1.37 U4-3.9 | length 518.8
  Top Layer w6: v1(3510,2380) 3512.14,2377.86 3545.61,2377.86 U4-3.9@3547.76,2375.71 ; v1(3635,2760) 3635.16,2759.84 3635.16,2720.04 U1.37@3635.32,2719.88
  Bottom Layer w6: v1(3510,2380) 3510,2425 3610,2525 3610,2747.38 3619.56,2756.94 3631.94,2756.94 v1(3635,2760)
ICM4_INT1: U1.68 U4-4.4 | length 1596.6
  Top Layer w6: v1(3905,3120) 3906.71,3121.71 3958.41,3121.71 U1.68@3960.12,3123.43 ; v1(4080,3075) 4080,2830 4125,2785 4220,2785 4243,2762 4243,2600.03 4275.03,2568 4358,2568 v1(4360,2570) ; v1(4785,2355) 4786.02,2356.02 U4-4.4@4826.34,2356.02
  Bottom Layer w6: v1(3905,3120) 3935,3150 4053.28,3150 4080,3123.28 v1(4080,3075) ; v1(4360,2570) 4402.87,2570 4412.87,2580 4455,2580 4672,2363 4773.49,2363 4781.49,2355 v1(4785,2355)